# Allegro board eem2ttl.brd
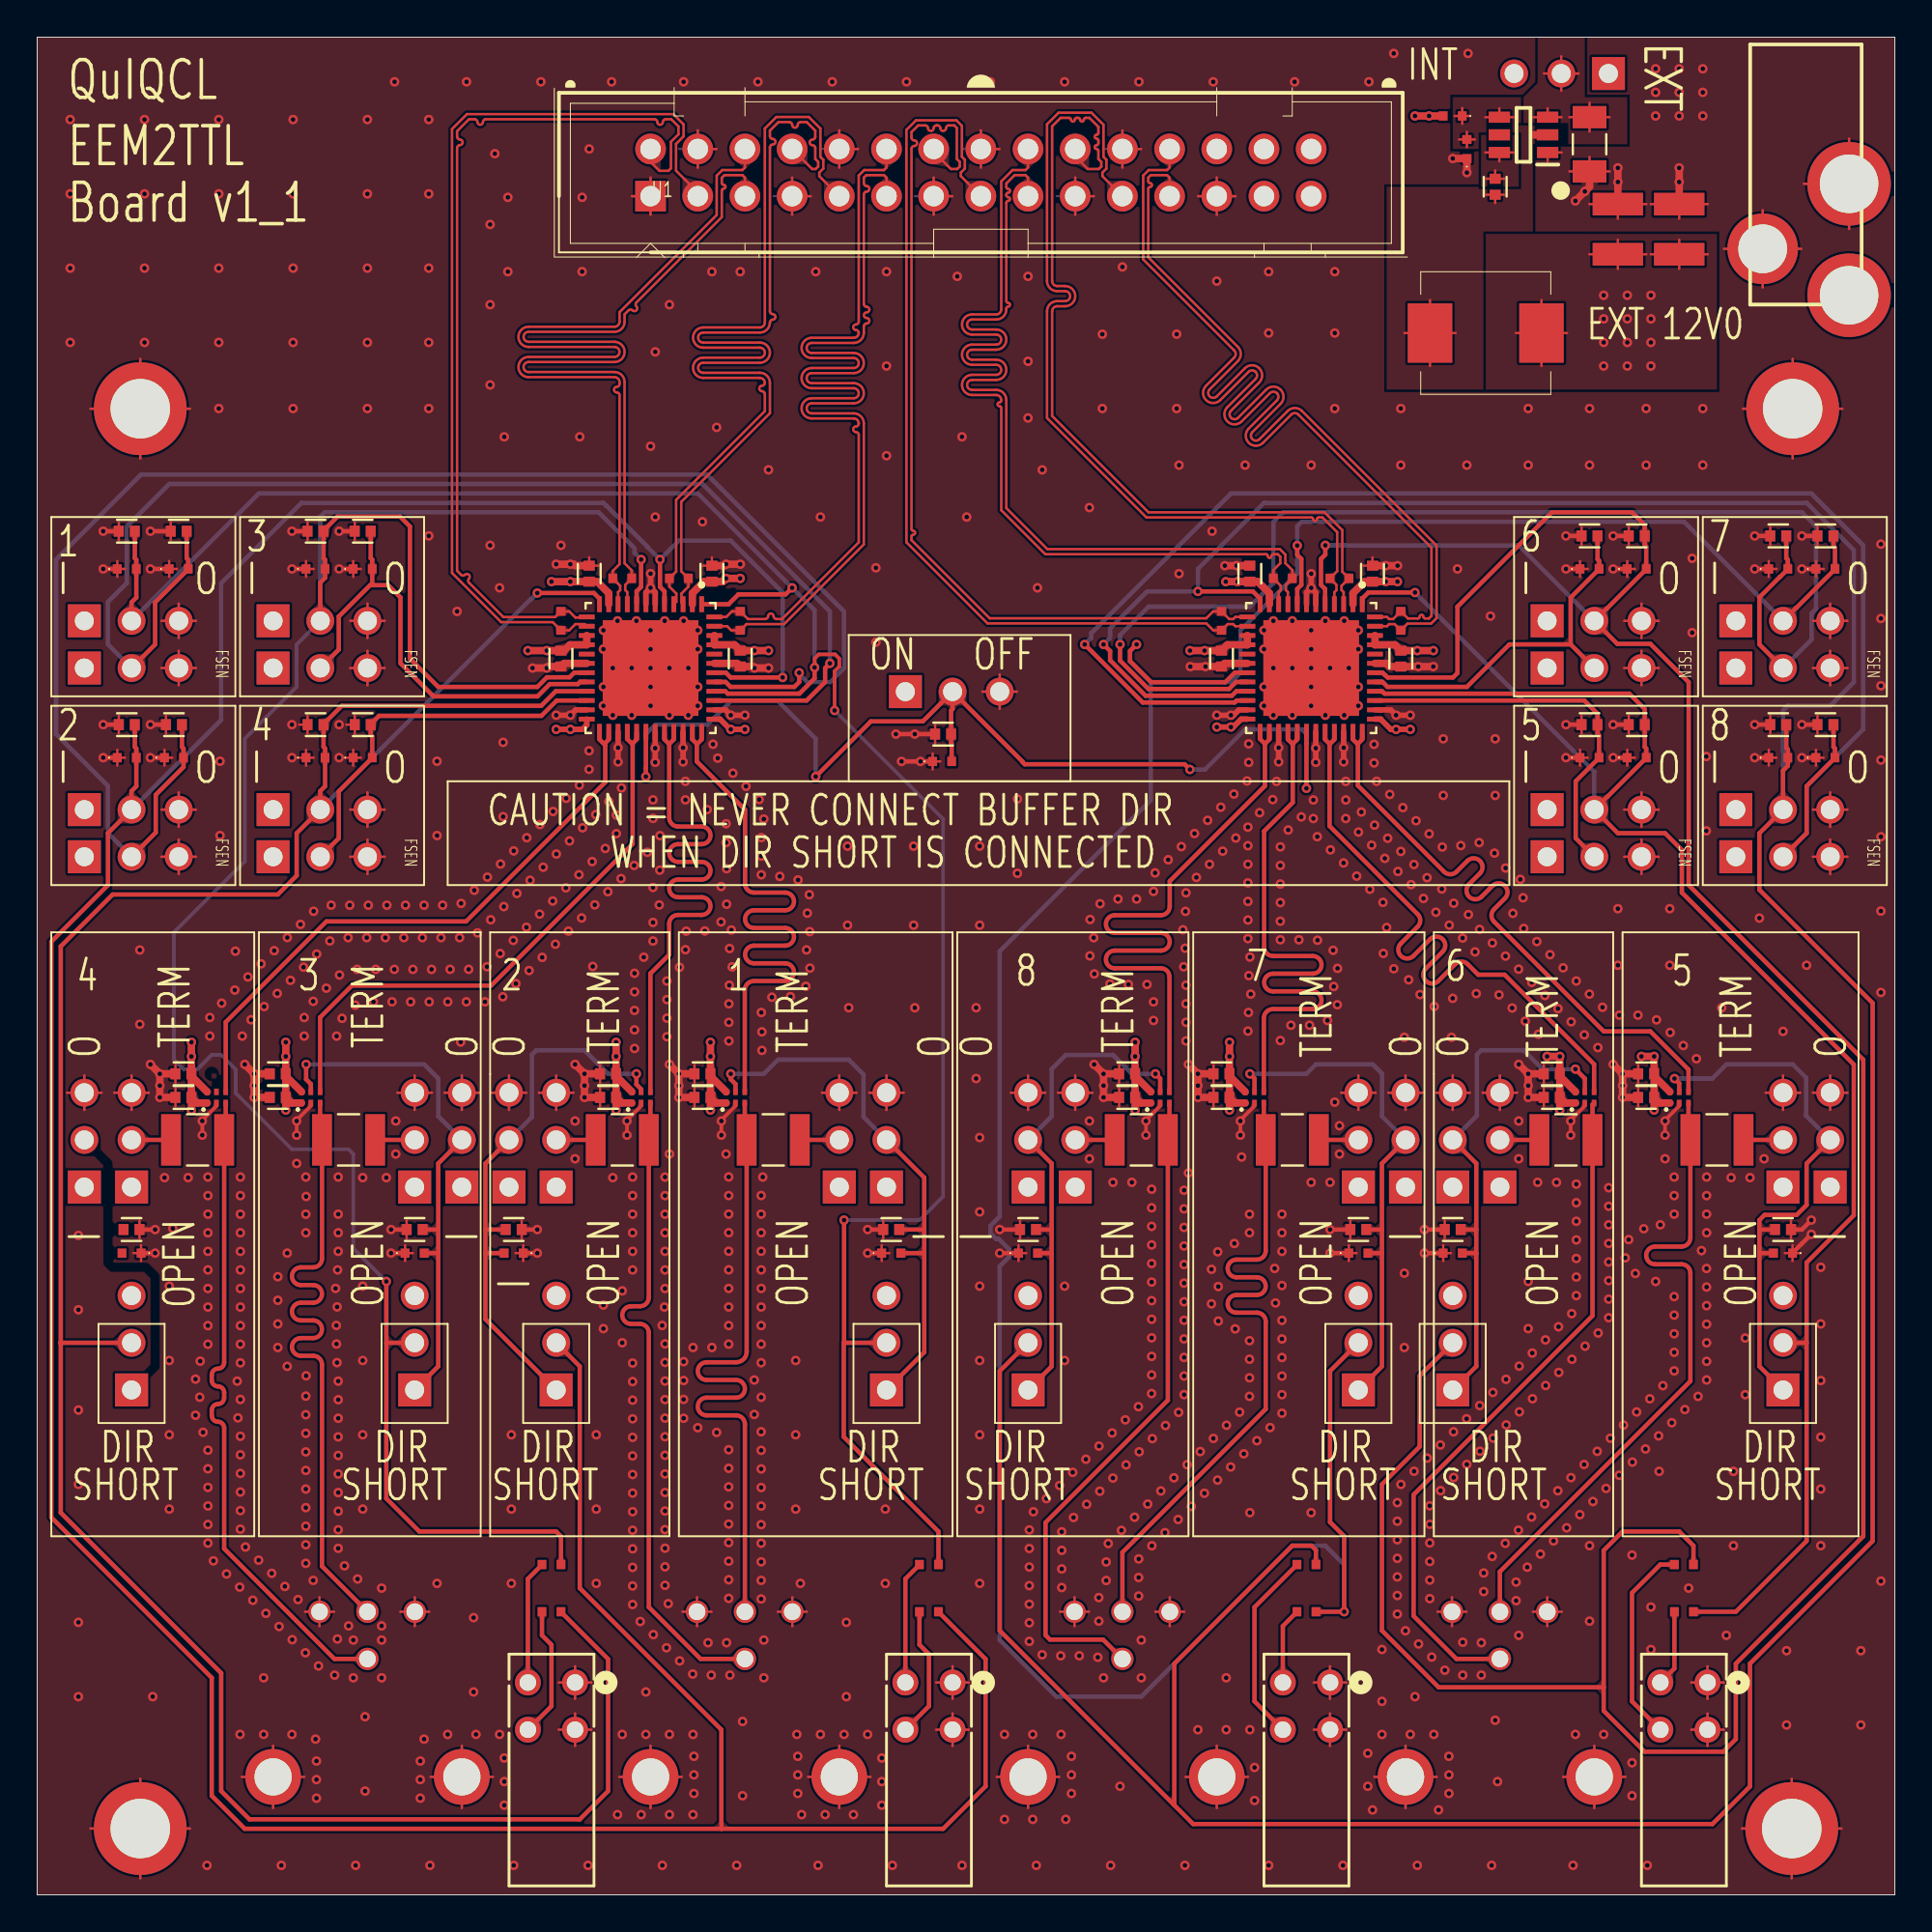
[diagram p0: board, top side]
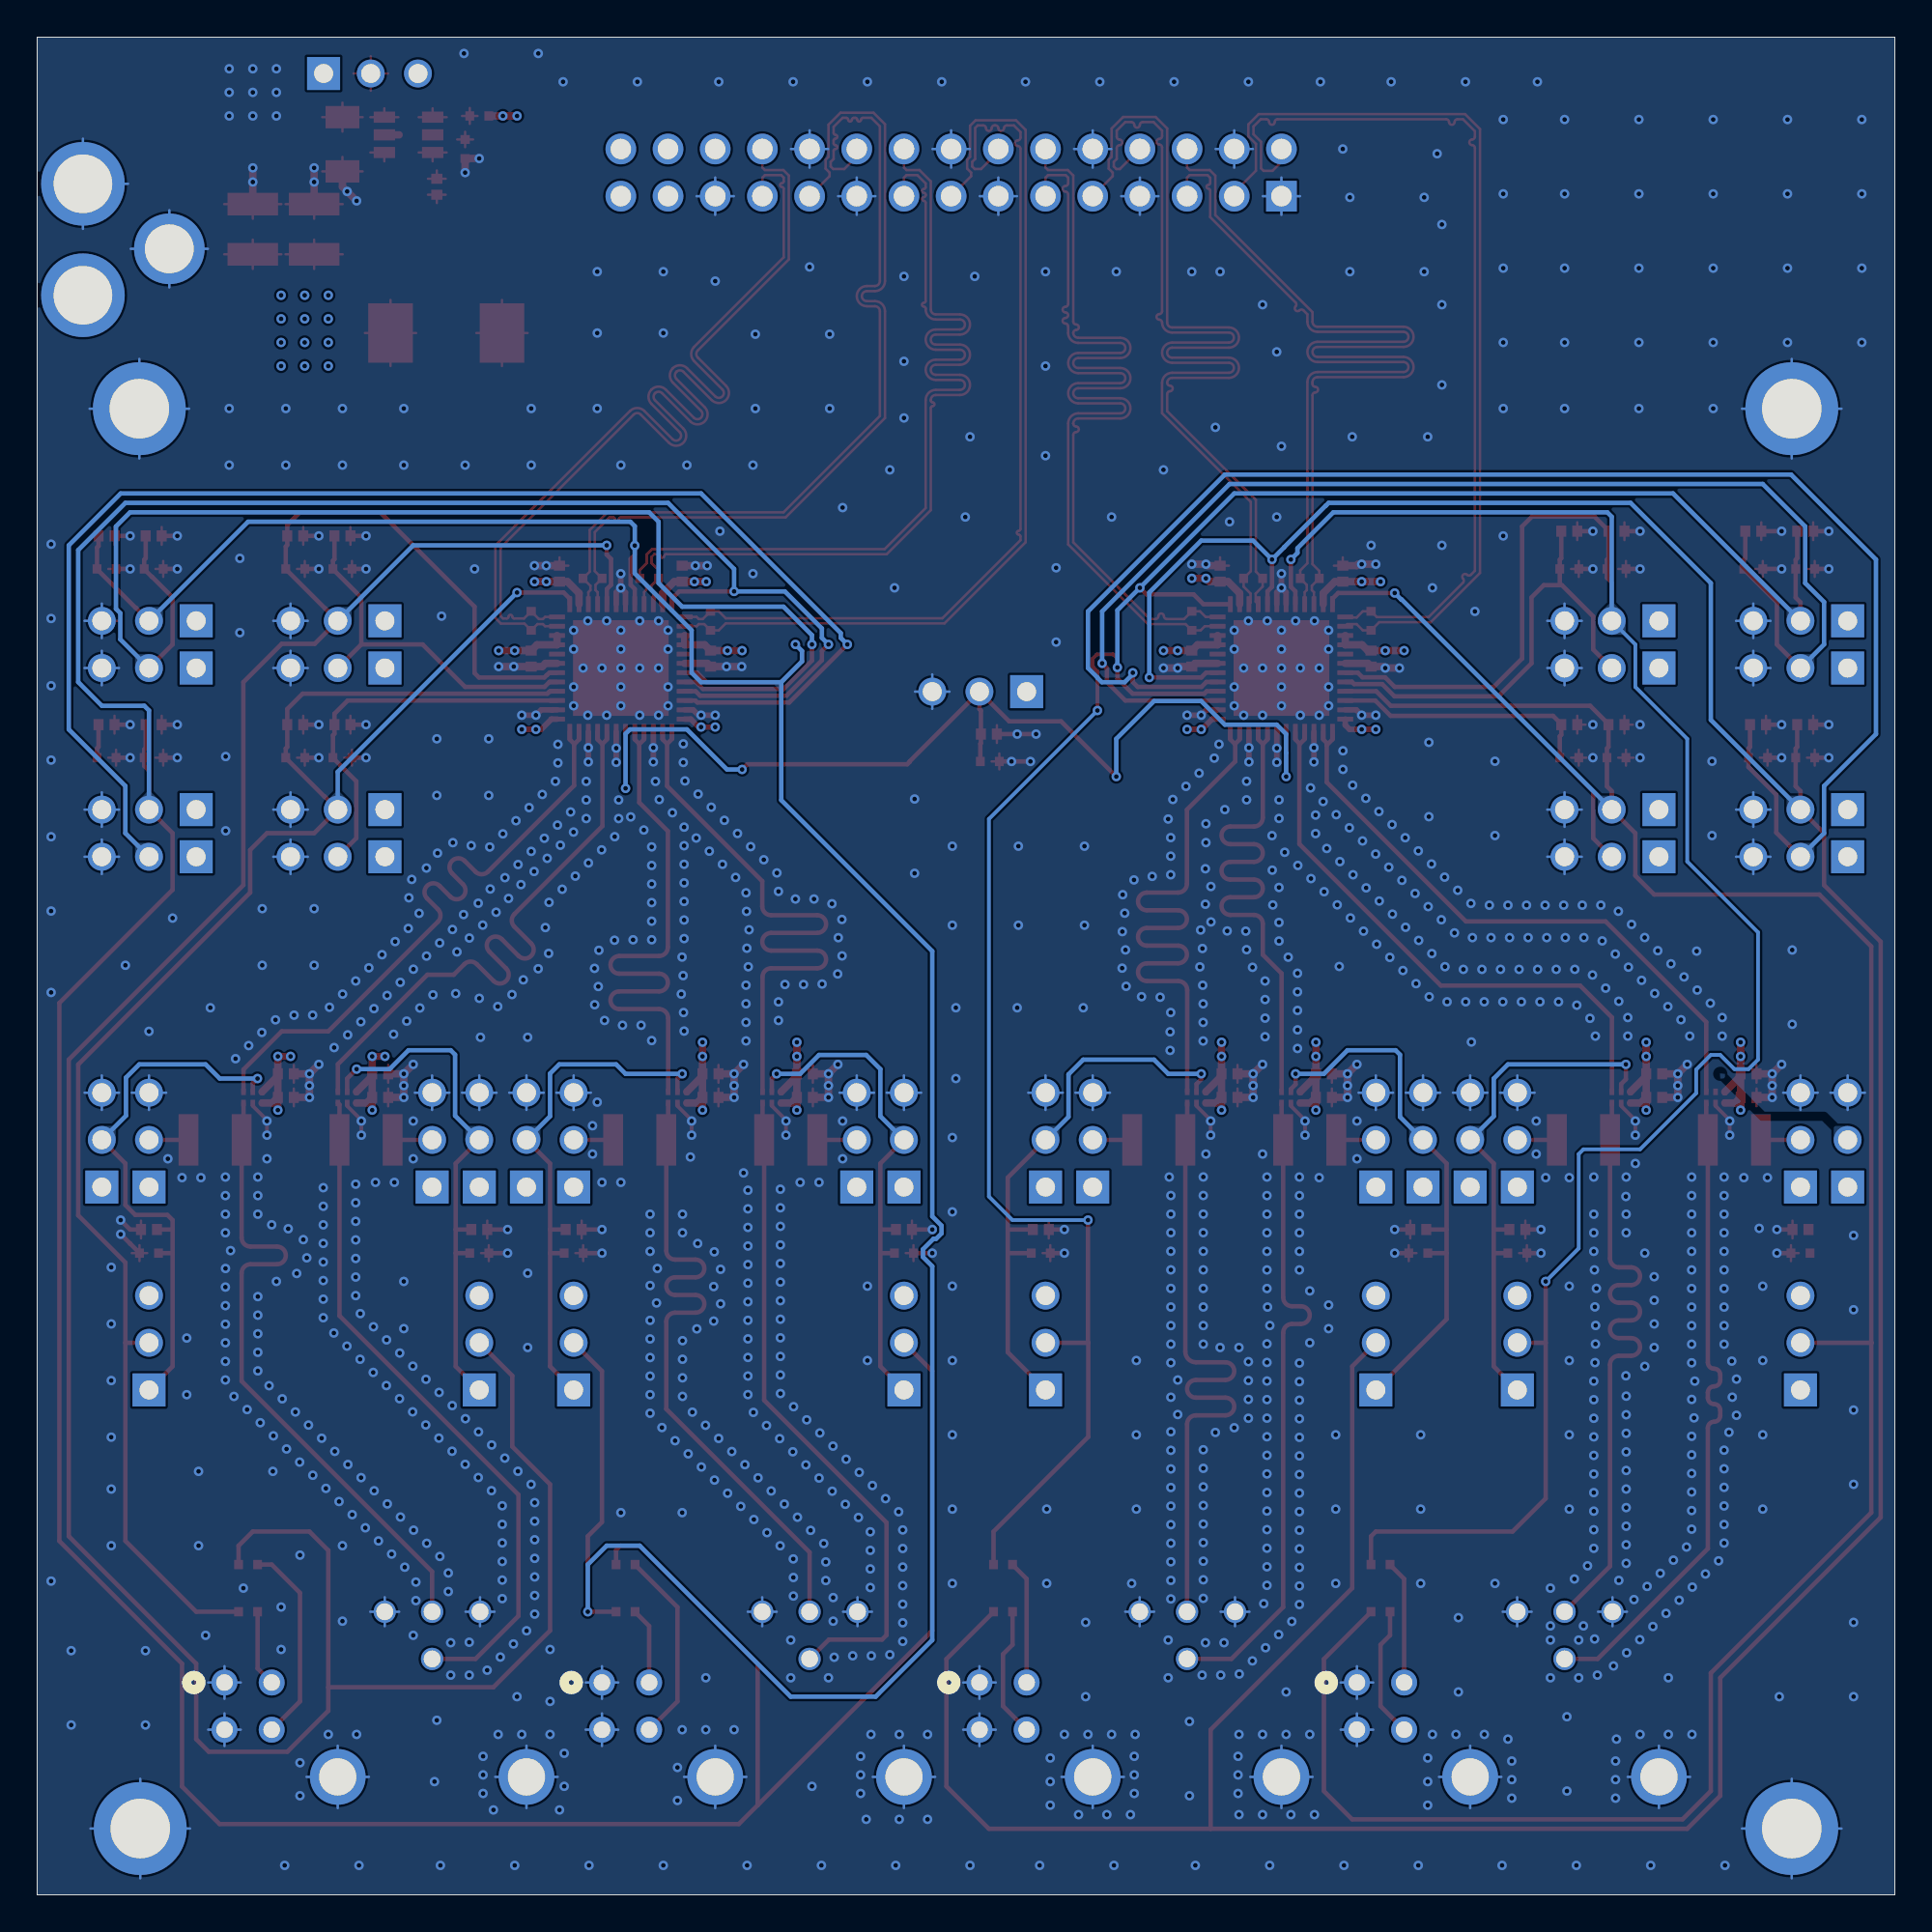
[diagram p1: board, bottom side, seen from below]

Outline 100 x 100 mm; copper layers: TOP, L1, L2, BOTTOM. Coordinates in mm from the lower left corner of the outline.
Outline path: 0,100 100,100 100,0 0,0 0,100

## Design rules (mm)
constraint set DEFAULT: min track width 0.127
net group LVDS: nets LVDS1_N LVDS1_P LVDS2_N LVDS2_P LVDS3_N LVDS3_P LVDS4_N LVDS4_P LVDS5_N LVDS5_P LVDS6_N LVDS6_P LVDS7_N LVDS7_P LVDS8_N LVDS8_P
net group SINGLE1: nets BUFFER_IN1 BUFFER_IN2 BUFFER_IN3 BUFFER_IN4 BUFFER_IN5 BUFFER_IN6 BUFFER_IN7 BUFFER_IN8
net group SINGLE2: nets BUFFER_OUT1 BUFFER_OUT2 BUFFER_OUT3 BUFFER_OUT4 BUFFER_OUT5 BUFFER_OUT6 BUFFER_OUT7 BUFFER_OUT8

## Placement (name value [footprint] x y rotation side)
C1  100nF  [CAPC1005X55N]  48.77 62.48 0 top
C2  100nF  [CAPC1005X55N]  78.49 91.95 90 top
C3  10uF  [CAPC3216X180N]  83.57 94.23 270 top
C4  22uF  [CAPC3225X270N]  85.09 89.66 270 top
C5  22uF  [CAPC3225X270N]  88.39 89.66 270 top
C6  100nF  [CAPC1005X55N]  4.83 73.41 0 top
C7  100nF  [CAPC1005X55N]  7.62 73.41 0 top
C8  100nF  [CAPC1005X55N]  45.97 35.81 0 top
C9  100nF  [CAPC1005X55N]  7.87 44.2 0 top
C10  100nF  [CAPC1005X55N]  7.87 42.93 0 top
C11  100nF  [CAPC1005X55N]  4.83 62.99 0 top
C12  100nF  [CAPC1005X55N]  7.37 62.99 0 top
C13  100nF  [CAPC1005X55N]  25.65 35.81 180 top
C14  100nF  [CAPC1005X55N]  12.95 44.2 0 top
C15  100nF  [CAPC1005X55N]  12.95 42.93 0 top
C16  100nF  [CAPC1005X55N]  14.99 73.41 0 top
C17  100nF  [CAPC1005X55N]  17.53 73.41 0 top
C18  100nF  [CAPC1005X55N]  20.32 35.81 0 top
C19  100nF  [CAPC1005X55N]  30.73 44.2 0 top
C20  100nF  [CAPC1005X55N]  30.73 42.93 0 top
C21  100nF  [CAPC1005X55N]  14.99 62.99 0 top
C22  100nF  [CAPC1005X55N]  17.53 62.99 0 top
C23  100nF  [CAPC1005X55N]  5.08 35.81 180 top
C24  100nF  [CAPC1005X55N]  35.81 44.2 0 top
C25  100nF  [CAPC1005X55N]  35.81 42.93 0 top
C26  100nF  [CAPC1005X55N]  86.11 62.99 0 top
C27  100nF  [CAPC1005X55N]  83.57 62.99 0 top
C28  100nF  [CAPC1005X55N]  93.98 35.81 180 top
C29  100nF  [CAPC1005X55N]  58.67 44.2 0 top
C30  100nF  [CAPC1005X55N]  58.67 42.93 0 top
C31  100nF  [CAPC1005X55N]  86.11 73.15 0 top
C32  100nF  [CAPC1005X55N]  83.57 73.15 0 top
C33  100nF  [CAPC1005X55N]  76.2 35.81 0 top
C34  100nF  [CAPC1005X55N]  63.75 42.93 0 top
C35  100nF  [CAPC1005X55N]  63.75 44.2 0 top
C36  100nF  [CAPC1005X55N]  96.27 73.15 0 top
C37  100nF  [CAPC1005X55N]  93.73 73.15 0 top
C38  100nF  [CAPC1005X55N]  71.12 35.81 0 top
C39  100nF  [CAPC1005X55N]  81.53 44.2 0 top
C40  100nF  [CAPC1005X55N]  81.53 42.93 0 top
C41  100nF  [CAPC1005X55N]  93.73 62.99 0 top
C42  100nF  [CAPC1005X55N]  96.27 62.99 0 top
C43  100nF  [CAPC1005X55N]  53.34 35.81 0 top
C44  100nF  [CAPC1005X55N]  86.61 44.2 0 top
C45  100nF  [CAPC1005X55N]  86.61 42.93 0 top
C46  100nF  [CAPC1005X55N]  37.85 66.55 90 top
C47  100nF  [CAPC1005X55N]  36.32 71.12 270 top
C48  100nF  [CAPC1005X55N]  29.72 71.12 270 top
C49  100nF  [CAPC1005X55N]  28.19 66.55 90 top
C50  100nF  [CAPC1005X55N]  73.41 66.55 90 top
C51  100nF  [CAPC1005X55N]  71.88 71.12 270 top
C52  100nF  [CAPC1005X55N]  65.28 71.12 270 top
C53  100nF  [CAPC1005X55N]  63.75 66.55 90 top
J1  DC-005-20A  [DC00520A]  97.54 86.11 270 top
M1  -  [M3MECHHOLE]  5.55 3.57 0 top
M2  -  [M3MECHHOLE]  94.45 3.57 0 top
M3  -  [M3MECHHOLE]  5.55 80 0 top
M4  -  [M3MECHHOLE]  94.5 80 0 top
PS1  AP62201WU-7  [SOT95P280X100-6N]  80.01 94.74 180 top
R1  30R  [RES_ERJ2RKF30R0X]  68.33 17.78 0 top
R2  30R  [RES_ERJ2RKF30R0X]  68.33 15.24 0 top
R3  30R  [RES_ERJ2RKF30R0X]  88.65 17.78 0 top
R4  30R  [RES_ERJ2RKF30R0X]  88.65 15.24 0 top
R5  30R  [RES_ERJ2RKF30R0X]  27.69 15.24 0 top
R6  30R  [RES_ERJ2RKF30R0X]  27.69 17.78 0 top
R7  30R  [RES_ERJ2RKF30R0X]  48.01 15.24 0 top
R8  30R  [RES_ERJ2RKF30R0X]  48.01 17.78 0 top
R9  10k  [ERJ2RKD1004X]  48.72 61.01 0 top
R10  31k6  [ERJ2RKD1004X]  76.2 95.76 180 top
R11  10k  [ERJ2RKD1004X]  76.96 93.98 90 top
R12  10k  [ERJ2RKD1004X]  4.83 71.37 0 top
R13  10k  [ERJ2RKD1004X]  7.62 71.37 0 top
R14  10k  [ERJ2RKD1004X]  45.97 34.54 0 top
R15  49R9  [RESC3126X65N]  39.62 40.64 180 top
R16  10k  [ERJ2RKD1004X]  4.83 61.21 0 top
R17  10k  [ERJ2RKD1004X]  7.37 61.21 0 top
R18  10k  [ERJ2RKD1004X]  25.65 34.54 180 top
R19  49R9  [RESC3126X65N]  31.5 40.64 0 top
R20  10k  [ERJ2RKD1004X]  14.99 71.37 0 top
R21  10k  [ERJ2RKD1004X]  17.53 71.37 0 top
R22  10k  [ERJ2RKD1004X]  20.32 34.54 0 top
R23  49R9  [RESC3126X65N]  16.76 40.64 180 top
R24  10k  [ERJ2RKD1004X]  14.99 61.21 0 top
R25  10k  [ERJ2RKD1004X]  17.53 61.21 0 top
R26  10k  [ERJ2RKD1004X]  5.08 34.54 180 top
R27  49R9  [RESC3126X65N]  8.64 40.64 0 top
R28  10k  [ERJ2RKD1004X]  86.11 61.21 0 top
R29  10k  [ERJ2RKD1004X]  83.57 61.21 0 top
R30  10k  [ERJ2RKD1004X]  93.98 34.54 180 top
R31  49R9  [RESC3126X65N]  90.42 40.64 180 top
R32  10k  [ERJ2RKD1004X]  86.11 71.37 0 top
R33  10k  [ERJ2RKD1004X]  83.57 71.37 0 top
R34  10k  [ERJ2RKD1004X]  76.2 34.54 0 top
R35  49R9  [RESC3126X65N]  82.3 40.64 0 top
R36  10k  [ERJ2RKD1004X]  96.27 71.37 0 top
R37  10k  [ERJ2RKD1004X]  93.73 71.37 0 top
R38  10k  [ERJ2RKD1004X]  71.12 34.54 0 top
R39  49R9  [RESC3126X65N]  67.56 40.64 180 top
R40  10k  [ERJ2RKD1004X]  93.73 61.21 0 top
R41  10k  [ERJ2RKD1004X]  96.27 61.21 0 top
R42  10k  [ERJ2RKD1004X]  53.34 34.54 0 top
R43  49R9  [RESC3126X65N]  59.44 40.64 0 top
R44  100.0R  [RES_ERJ2RKF1000X]  28.19 68.58 270 top
R45  100.0R  [RES_ERJ2RKF1000X]  31.5 70.87 180 top
R46  100.0R  [RES_ERJ2RKF1000X]  34.54 70.87 180 top
R47  100.0R  [RES_ERJ2RKF1000X]  37.85 68.58 90 top
R48  100.0R  [RES_ERJ2RKF1000X]  63.75 68.58 270 top
R49  100.0R  [RES_ERJ2RKF1000X]  67.06 70.87 180 top
R50  100.0R  [RES_ERJ2RKF1000X]  70.1 70.87 180 top
R51  100.0R  [RES_ERJ2RKF1000X]  73.41 68.58 90 top
U1  -  [N2530-6002-RB_3M]  33.02 91.44 0 top
U2  IC4_WP934EB2GD  [IC4_WP934EB2GD_KNB]  69.6 11.43 0 top
U3  IC4_WP934EB2GD  [IC4_WP934EB2GD_KNB]  89.92 11.43 0 top
U4  IC4_WP934EB2GD  [IC4_WP934EB2GD_KNB]  28.96 11.43 0 top
U5  IC4_WP934EB2GD  [IC4_WP934EB2GD_KNB]  49.28 11.43 0 top
U6  -  [DOSIN-801-0093]  38.1 12.7 180 top
U7  -  [DOSIN-801-0093]  17.78 12.7 180 top
U8  -  [DOSIN-801-0093]  78.74 12.7 180 top
U9  -  [PIN3BOOMELE]  82.04 98.04 180 top
U10  -  [DOSIN-801-0093]  58.42 12.7 180 top
U11  -  [PIN3BOOMELE]  49.28 64.77 0 top
U12  3.3uH  [MWSA0603S-3R3MT]  77.98 84.07 0 top
U14  -  [PIN3BOOMELE]  45.72 29.72 90 top
U15  -  [PIN3BOOMELE]  45.72 40.64 90 top
U16  -  [PIN3BOOMELE]  5.08 68.58 0 top
U17  -  [PIN3BOOMELE]  5.08 66.04 0 top
U18  -  [PIN3BOOMELE]  43.18 40.64 90 top
U19  -  [SN74LXC1T45DRYR]  37.59 42.93 0 top
U21  -  [PIN3BOOMELE]  27.94 29.72 90 top
U22  -  [PIN3BOOMELE]  25.4 40.64 90 top
U23  -  [PIN3BOOMELE]  5.08 58.42 0 top
U24  -  [PIN3BOOMELE]  5.08 55.88 0 top
U25  -  [PIN3BOOMELE]  27.94 40.64 90 top
U26  -  [SN74LXC1T45DRYR]  32.51 42.93 0 top
U28  -  [PIN3BOOMELE]  20.32 29.72 90 top
U29  -  [PIN3BOOMELE]  22.86 40.64 90 top
U30  -  [PIN3BOOMELE]  15.24 68.58 0 top
U31  -  [PIN3BOOMELE]  15.24 66.04 0 top
U32  -  [PIN3BOOMELE]  20.32 40.64 90 top
U33  -  [SN74LXC1T45DRYR]  14.73 42.93 0 top
U35  -  [PIN3BOOMELE]  5.08 29.72 90 top
U36  -  [PIN3BOOMELE]  2.54 40.64 90 top
U37  -  [PIN3BOOMELE]  15.24 58.42 0 top
U38  -  [PIN3BOOMELE]  15.24 55.88 0 top
U39  -  [PIN3BOOMELE]  5.08 40.64 90 top
U40  -  [SN74LXC1T45DRYR]  9.65 42.93 0 top
U42  -  [PIN3BOOMELE]  93.98 29.72 90 top
U43  -  [PIN3BOOMELE]  96.52 40.64 90 top
U44  -  [PIN3BOOMELE]  83.82 58.42 0 top
U45  -  [PIN3BOOMELE]  83.82 55.88 0 top
U46  -  [PIN3BOOMELE]  93.98 40.64 90 top
U47  -  [SN74LXC1T45DRYR]  88.39 42.93 0 top
U49  -  [PIN3BOOMELE]  76.2 29.72 90 top
U50  -  [PIN3BOOMELE]  76.2 40.64 90 top
U51  -  [PIN3BOOMELE]  83.82 68.58 0 top
U52  -  [PIN3BOOMELE]  83.82 66.04 0 top
U53  -  [PIN3BOOMELE]  78.74 40.64 90 top
U54  -  [SN74LXC1T45DRYR]  83.31 42.93 0 top
U56  -  [PIN3BOOMELE]  71.12 29.72 90 top
U57  -  [PIN3BOOMELE]  73.66 40.64 90 top
U58  -  [PIN3BOOMELE]  93.98 68.58 0 top
U59  -  [PIN3BOOMELE]  93.98 66.04 0 top
U60  -  [PIN3BOOMELE]  71.12 40.64 90 top
U61  -  [SN74LXC1T45DRYR]  65.53 42.93 0 top
U63  -  [PIN3BOOMELE]  53.34 29.72 90 top
U64  -  [PIN3BOOMELE]  53.34 40.64 90 top
U65  -  [PIN3BOOMELE]  93.98 58.42 0 top
U66  -  [PIN3BOOMELE]  93.98 55.88 0 top
U67  -  [PIN3BOOMELE]  55.88 40.64 90 top
U68  -  [SN74LXC1T45DRYR]  60.45 42.93 0 top
U69  SN65MLVD040RGZ  [QFN50P700X700X100-49N]  33.02 66.04 270 top
U70  SN65MLVD040RGZ  [QFN50P700X700X100-49N]  68.58 66.04 270 top

## Library data of the parts
C1 C2 C6-C53 = TMK105BJ104KV-F
C3 = CL31A106KBHNNNE
C4 C5 = TMK325BJ226MM-T
J1 = DC-005-20A
M1-M4 = M3MECHHOLE
PS1 = AP62201WU-7
R1-R8 = ERJ2RKF30R0X
R9 R11-R14 R16-R18 R20-R22 R24-R26 R28-R30 R32-R34 R36-R38 R40-R42 = ERJ2RKF1002X_0
R10 = ERJ-2RKF3162X_0
R15 R19 R23 R27 R31 R35 R39 R43 = AC1210FR-0749R9L
R44-R51 = ERJ2RKF1000X
U1 = N2530-6002-RB_3M
U2 U4 U5 = WP934EB2GD_0
U3 = WP934EB2GD_0: User Part Number: PN; Tolerance: TOL
U6-U8 U10 = DOSIN-801-0093
U9 U11 U14-U18 U21-U25 U28-U32 U35-U39 U42-U46 U49-U53 U56-U60 U63-U67 = PIN3BOOMELE
U12 = MWSA0603S-3R3MT
U19 U26 U33 U40 U47 U54 U61 U68 = SN74LXC1T45DRYR
U69 U70 = SN65MLVD040RGZT

## Footprints (pads in the part's own frame, mm; a bottom-side part is the same pattern mirrored in y, then rotated)
CAPC1005X55N
  rect 0.54x0.6 smd: 1(-0.43,0) 2(0.43,0)
CAPC3216X180N
  rect 1.2x1.82 smd: 1(-1.46,0) 2(1.46,0)
CAPC3225X270N
  rect 1.22x2.72 smd: 1(-1.35,0) 2(1.35,0)
DC00520A
  round 4.5 hole 3.15: 1(0,0) 2(-6,0)
  round 3.8 hole 2.625: 3(-2.5,-4.65)
DOSIN-801-0093
  round 1.2 hole 0.9: 1(-2.55,-2.54) 2(0,-2.54) 3(2.58,-2.54) 4(0,0)
  round 3 hole 2: 5(-5.08,6.35) 6(5.08,6.35)
ERJ2RKD1004X
  rect 0.475x0.5 smd: 1(-0.512,0) 2(0.512,0)
IC4_WP934EB2GD_KNB
  round 1.397 hole 0.889: 1(0,0) 2(-2.54,0) 3(0,-2.54) 4(-2.54,-2.54)
M3MECHHOLE
  round 5 hole 3.2: 1(0,0)
MWSA0603S-3R3MT
  rect 2.4x3.2 smd: 1(-3,0) 2(3,0)
N2530-6002-RB_3M
  rect 1.651x1.651 hole 1.1: 1(0,0)
  round 1.651 hole 1.1: 2(0,2.54) 3(2.54,0) 4(2.54,2.54) 5(5.08,0) 6(5.08,2.54) 7(7.62,0) 8(7.62,2.54) 9(10.16,0) 10(10.16,2.54) 11(12.7,0) 12(12.7,2.54) 13(15.24,0) 14(15.24,2.54) 15(17.78,0) 16(17.78,2.54) 17(20.32,0) 18(20.32,2.54) 19(22.86,0) 20(22.86,2.54) 21(25.4,0) 22(25.4,2.54) 23(27.94,0) 24(27.94,2.54) 25(30.48,0) 26(30.48,2.54) 27(33.02,0) 28(33.02,2.54) 29(35.56,0) 30(35.56,2.54)
PIN3BOOMELE
  rect 1.778x1.778 hole 1.02: 1(-2.54,0)
  round 1.5 hole 1.02: 2(0,0) 3(2.54,0)
QFN50P700X700X100-49N
  custom 0.86x0.26 smd: 1(-3.435,2.75) 2(-3.435,2.25) 3(-3.435,1.75) 4(-3.435,1.25) 5(-3.435,0.75) 6(-3.435,0.25) 7(-3.435,-0.25) 8(-3.435,-0.75) 9(-3.435,-1.25) 10(-3.435,-1.75) 11(-3.435,-2.25) 12(-3.435,-2.75) 25(3.435,-2.75) 26(3.435,-2.25) 27(3.435,-1.75) 28(3.435,-1.25) 29(3.435,-0.75) 30(3.435,-0.25) 31(3.435,0.25) 32(3.435,0.75) 33(3.435,1.25) 34(3.435,1.75) 35(3.435,2.25) 36(3.435,2.75)
  custom 0.26x0.86 smd: 13(-2.75,-3.435) 14(-2.25,-3.435) 15(-1.75,-3.435) 16(-1.25,-3.435) 17(-0.75,-3.435) 18(-0.25,-3.435) 19(0.25,-3.435) 20(0.75,-3.435) 21(1.25,-3.435) 22(1.75,-3.435) 23(2.25,-3.435) 24(2.75,-3.435) 37(2.75,3.435) 38(2.25,3.435) 39(1.75,3.435) 40(1.25,3.435) 41(0.75,3.435) 42(0.25,3.435) 43(-0.25,3.435) 44(-0.75,3.435) 45(-1.25,3.435) 46(-1.75,3.435) 47(-2.25,3.435) 48(-2.75,3.435)
  rect 5.15x5.15 smd: 49(0,0)
RES_ERJ2RKF30R0X
  rect 0.475x0.5 smd: 1(-0.512,0) 2(0.512,0)
RES_ERJ2RKF1000X
  rect 0.475x0.5 smd: 1(-0.512,0) 2(0.512,0)
RESC3126X65N
  rect 1.07x2.77 smd: 1(-1.43,0) 2(1.43,0)
SN74LXC1T45DRYR
  rect 0.25x0.35 smd: 1(-0.5,-0.3) 2(0,-0.3) 3(0.5,-0.3) 4(0.5,0.3) 5(0,0.3) 6(-0.5,0.3)
SOT95P280X100-6N
  rect 1.15x0.6 smd: 1(-1.3,0.95) 2(-1.3,0) 3(-1.3,-0.95) 4(1.3,-0.95) 5(1.3,0) 6(1.3,0.95)

## Nets
3V3: C4.2 C5.2 C9.2 C10.2 C14.2 C15.2 C19.2 C20.2 C24.2 C25.2 C29.2 C30.2 C34.2 C35.2 C39.2 C40.2 C44.2 C45.2 C46.2 C47.2 C48.2 C49.2 C50.2 C51.2 C52.2 C53.2 R10.2 U11.1 U12.2 U15.1 U16.1 U17.1 U19.1 U19.6(VCCB) U22.1 U23.1 U24.1 U26.1 U26.6(VCCB) U29.1 U30.1 U31.1 U33.1 U33.6(VCCB) U36.1 U37.1 U38.1 U40.1 U40.6(VCCB) U43.1 U44.1 U45.1 U47.1 U47.6(VCCB) U50.1 U51.1 U52.1 U54.1 U54.6(VCCB) U57.1 U58.1 U59.1 U61.1 U61.6(VCCB) U64.1 U65.1 U66.1 U68.1 U68.6(VCCB) U69.2 U69.11 U69.15 U69.16 U69.24 U69.37 U69.45 U69.46(VCC#46) U70.2 U70.11 U70.15 U70.16 U70.24 U70.37 U70.45 U70.46(VCC#46)
12V0: C3.1 PS1.3(VIN) U9.2
12V0EEM: U1.28 U1.29 U9.3
12V0EXT: J1.1 U9.1
GND: C1.1 C3.2 C4.1 C5.1 C6.1 C7.1 C8.1 C9.1 C10.1 C11.1 C12.1 C13.1 C14.1 C15.1 C16.1 C17.1 C18.1 C19.1 C20.1 C21.1 C22.1 C23.1 C24.1 C25.1 C26.1 C27.1 C28.1 C29.1 C30.1 C31.1 C32.1 C33.1 C34.1 C35.1 C36.1 C37.1 C38.1 C39.1 C40.1 C41.1 C42.1 C43.1 C44.1 C45.1 C46.1 C47.1 C48.1 C49.1 C50.1 C51.1 C52.1 C53.1 J1.2 J1.3 M1.1(GND) M2.1(GND) M3.1(GND) M4.1(GND) PS1.1 R9.1 R11.1 R12.1 R13.1 R14.1 R16.1 R17.1 R18.1 R20.1 R21.1 R22.1 R24.1 R25.1 R26.1 R28.1 R29.1 R30.1 R32.1 R33.1 R34.1 R36.1 R37.1 R38.1 R40.1 R41.1 R42.1 U1.1 U1.4 U1.7 U1.10 U1.13 U1.16 U1.19 U1.22 U1.25 U2.1 U2.3 U3.1 U3.3 U4.1 U4.3 U5.1 U5.3 U6.1 U6.3 U6.5 U6.6 U7.1 U7.3 U7.5 U7.6 U8.1 U8.3 U8.5 U8.6 U10.1 U10.3 U10.5 U10.6 U11.3 U15.3 U16.3 U17.3 U18.3 U19.2 U22.3 U23.3 U24.3 U25.3 U26.2 U29.3 U30.3 U31.3 U32.3 U33.2 U36.3 U37.3 U38.3 U39.3 U40.2 U43.3 U44.3 U45.3 U46.3 U47.2 U50.3 U51.3 U52.3 U53.3 U54.2 U57.3 U58.3 U59.3 U60.3 U61.2 U64.3 U65.3 U66.3 U67.3 U68.2 U69.6 U69.7 U69.18 U69.23 U69.27 U69.31 U69.34 U69.38 U69.43 U69.49 U70.6 U70.7 U70.18 U70.23 U70.27 U70.31 U70.34 U70.38 U70.43 U70.49
BUFFER_IN1: U19.4 U69.35 U69.36
BUFFER_IN2: U26.4 U69.32 U69.33
BUFFER_IN3: U33.4 U69.28 U69.29
BUFFER_IN4: U40.4 U69.25 U69.26
BUFFER_IN5: U47.4 U70.35 U70.36
BUFFER_IN6: U54.4 U70.32 U70.33
BUFFER_IN7: U61.4 U70.28 U70.29
BUFFER_IN8: U68.4 U70.25 U70.26
BUFFER_OUT1: R15.2 U6.2(SIG_UP) U19.3
BUFFER_OUT2: R19.2 U6.4 U26.3
BUFFER_OUT3: R23.2 U7.2(SIG_UP) U33.3
BUFFER_OUT4: R27.2 U7.4 U40.3
BUFFER_OUT5: R31.2 U8.2(SIG_UP) U47.3
BUFFER_OUT6: R35.2 U8.4 U54.3
BUFFER_OUT7: R39.2 U10.2(SIG_UP) U61.3
BUFFER_OUT8: R43.2 U10.4 U68.3
DIR1: C6.2 R8.2 R12.2 U14.2 U16.2 U69.1 U69.40
DIR2: C11.2 R7.2 R16.2 U21.2 U23.2 U69.5 U69.42
DIR3: C16.2 R6.2 R20.2 U28.2 U30.2 U69.8 U69.19
DIR4: C21.2 R5.2 R24.2 U35.2 U37.2 U69.12 U69.21
DIR5: C26.2 R4.2 R28.2 U42.2 U44.2 U70.1 U70.40
DIR6: C31.2 R3.2 R32.2 U49.2 U51.2 U70.5 U70.42
DIR7: C36.2 R2.2 R36.2 U56.2 U58.2 U70.8 U70.19
DIR8: C41.2 R1.2 R40.2 U63.2 U65.2 U70.12 U70.21
DIR_BUFFER1: C8.2 R14.2 U14.1 U15.2 U19.5
DIR_BUFFER2: C13.2 R18.2 U21.1 U22.2 U26.5
DIR_BUFFER3: C18.2 R22.2 U28.1 U29.2 U33.5
DIR_BUFFER4: C23.2 R26.2 U35.1 U36.2 U40.5
DIR_BUFFER5: C28.2 R30.2 U42.1 U43.2 U47.5
DIR_BUFFER6: C33.2 R34.2 U49.1 U50.2 U54.5
DIR_BUFFER7: C38.2 R38.2 U56.1 U57.2 U61.5
DIR_BUFFER8: C43.2 R42.2 U63.1 U64.2 U68.5
FSEN1: C7.2 R13.2 U17.2 U69.39
FSEN2: C12.2 R17.2 U24.2 U69.41
FSEN3: C17.2 R21.2 U31.2 U69.20
FSEN4: C22.2 R25.2 U38.2 U69.22
FSEN5: C27.2 R29.2 U45.2 U70.39
FSEN6: C32.2 R33.2 U52.2 U70.41
FSEN7: C37.2 R37.2 U59.2 U70.20
FSEN8: C42.2 R41.2 U66.2 U70.22
LVDS1_N: R47.2 U1.12 U69.48
LVDS1_P: R47.1 U1.11 U69.47
LVDS2_N: R46.2 U1.9 U69.4
LVDS2_P: R46.1 U1.8 U69.3
LVDS3_N: R45.2 U1.6 U69.10
LVDS3_P: R45.1 U1.5 U69.9
LVDS4_N: R44.2 U1.3 U69.14
LVDS4_P: R44.1 U1.2 U69.13
LVDS5_N: R51.2 U1.24 U70.48
LVDS5_P: R51.1 U1.23 U70.47
LVDS6_N: R50.2 U1.21 U70.4
LVDS6_P: R50.1 U1.20 U70.3
LVDS7_N: R49.2 U1.18 U70.10
LVDS7_P: R49.1 U1.17 U70.9
LVDS8_N: R48.2 U1.15 U70.14
LVDS8_P: R48.1 U1.14 U70.13
TERM1: R15.1 U18.2
TERM2: R19.1 U25.2
TERM3: R23.1 U32.2
TERM4: R27.1 U39.2
TERM5: R31.1 U46.2
TERM6: R35.1 U53.2
TERM7: R39.1 U60.2
TERM8: R43.1 U67.2
N208059: C2.1 PS1.2 U12.1
N208159: C2.2 PS1.6
N208207: PS1.4 R10.1 R11.2
N212931: C1.2 R9.2 U11.2 U69.30 U70.30
N242811: R1.1 U2.4
N242851: R2.1 U2.2(TOP)
N242977: R3.1 U3.4
N242981: R4.1 U3.2(TOP)
N243125: R5.1 U4.4
N243129: R6.1 U4.2(TOP)
N243275: R7.1 U5.4
N243279: R8.1 U5.2(TOP)

Pads without a net: PS1 5; U1 26 27 30; U14 3; U18 1; U21 3; U25 1; U28 3; U32 1; U35 3; U39 1; U42 3; U46 1; U49 3; U53 1; U56 3; U60 1; U63 3; U67 1; U69 17 44; U70 17 44

## Via types
v1: diameter 0.508, hole 0.254, TOP to BOTTOM, 1430 vias

## Routing (per net, layer and track width the routed paths; a pad name or vN(x,y) marks a point on that pad's centre or on a via; arc(x,y) is an arc through that point)
3V3: length 206.9
  TOP w0.127: 86.85,88.31 C5.2 ; C5.2 88.39,89.1 ; C5.2 88.39,87.52 ; C5.2 89.93,88.31 ; 79.6,84.07 U12.2 ; U12.2 80.98,85.85 ; U12.2 82.36,84.07 ; U12.2 80.98,82.3 ; C4.2 85.09,89.1 ; C4.2 83.55,88.31 ; C4.2 85.09,87.52 ; C4.2 86.63,88.31
  TOP w0.3: U69.37 36.76,63.29 37.31,62.74 v1(37.34,62.74) v1(38.1,62.74) ; U70.24 64.81,63.29 64.39,62.87 v1(64.26,62.87) v1(63.5,62.87) ; U70.37 72.31,63.29 72.87,62.74 v1(73.15,62.74) v1(73.91,62.74) ; 29.59,63.29 29.59,62.97 29.35,62.74 v1(28.7,62.74) v1(27.94,62.74)
  TOP w0.4: 13.38,44.07 U33.6 ; 13.38,44.07 C14.2 v1(13.38,45.13) v1(13.38,45.9) ; 13.38,44.07 C15.2 ; C25.2 36.24,44.07 ; C25.2 v1(36.24,42.24) ; C25.2 36.54,42.63 U19.1 ; 36.24,44.07 U19.6 ; 36.24,44.07 C24.2 v1(36.24,45.13) v1(36.24,45.9) ; v1(75.16,66.98) v1(74.3,66.98) C50.2 73.09,67.29 U70.45 U70.46 ; C15.2 13.68,42.63 U33.1 ; C15.2 v1(13.38,42.24) ; 81.96,44.07 C39.2 v1(81.96,45.13) v1(81.28,45.13) ; 81.96,44.07 C40.2 ; 81.96,44.07 U54.6 ; C34.2 v1(64.18,42.24) ; C34.2 64.18,44.07 ; C34.2 64.48,42.63 U61.1 ; 29.59,67.79 29.59,67.29 28.68,67.29 28.37,66.98 C49.2 v1(27.43,66.98) v1(26.42,66.98) ; v1(63.98,70.69) v1(64.62,70.69) C52.2 65.71,70.69 66.33,70.07 U70.11 ; v1(27.69,70.69) v1(28.7,70.69) C48.2 30.15,70.69 30.77,70.07 U69.11 ; C20.2 31.16,44.07 ; C20.2 31.46,42.63 U26.1 ; C20.2 v1(31.16,42.24) ; 31.16,44.07 U26.6 ; 31.16,44.07 C19.2 v1(31.16,45.13) v1(31.16,45.9) ; U68.1 59.4,42.63 C30.2 ; v1(59.1,45.9) v1(59.1,45.13) C29.2 59.1,44.07 ; v1(73.23,70.69) v1(72.59,70.69) C51.2 71.45,70.69 70.83,70.07 U70.2 ; v1(8.3,45.9) v1(8.3,45.13) C9.2 8.3,44.07 ; v1(39.37,66.98) v1(38.61,66.98) C46.2 37.53,67.29 U69.45 U69.46 ; R10.2 v1(74.93,95.76) v1(74.17,95.76) ; v1(86.36,45.13) v1(87.04,45.13) C44.2 87.04,44.07 ; U47.1 87.34,42.63 C45.2 ; 87.04,44.07 U47.6 ; 87.04,44.07 C45.2 ; 59.1,44.07 C30.2 ; 59.1,44.07 U68.6 ; v1(62.05,66.98) v1(62.84,66.98) C53.2 64.07,67.29 U70.16 U70.15 ; U54.1 82.26,42.63 C40.2 ; C10.2 v1(8.3,42.24) ; C10.2 8.6,42.63 U40.1 ; C10.2 8.3,44.07 ; 64.18,44.07 C35.2 v1(64.18,45.13) v1(64.18,45.9) ; 64.18,44.07 U61.6 ; U69.2 35.27,70.07 35.89,70.69 C47.2 36.91,70.69 v1(37.08,70.87) v1(37.85,70.87) ; C30.2 v1(59.1,42.24) ; C40.2 v1(81.96,42.24) ; 8.3,44.07 U40.6 ; C45.2 v1(87.04,42.24)
  L2 w0.127: U38.1 13.77,55.88 ; U38.1 11.63,55.88 ; U38.1 12.7,56.95 ; U38.1 12.7,54.81 ; U16.1 2.54,69.65 ; U16.1 3.61,68.58 ; U16.1 2.54,67.51 ; U16.1 1.47,68.58 ; 90.37,68.58 U58.1 ; U58.1 92.51,68.58 ; U58.1 91.44,67.51 ; U58.1 91.44,69.65 ; 12.7,67.51 U30.1 ; U30.1 11.63,68.58 ; U30.1 13.77,68.58 ; U30.1 12.7,69.65 ; 81.28,64.97 U52.1 ; U52.1 81.28,67.11 ; U52.1 82.35,66.04 ; U52.1 80.21,66.04 ; 12.7,57.35 U37.1 ; U37.1 13.77,58.42 ; U37.1 11.63,58.42 ; U37.1 12.7,59.49 ; U15.1 46.79,38.1 ; U15.1 45.72,39.17 ; U15.1 44.65,38.1 ; U15.1 45.72,37.03 ; U22.1 26.47,38.1 ; U22.1 24.33,38.1 ; U22.1 25.4,37.03 ; U22.1 25.4,39.17 ; U65.1 91.44,59.49 ; U65.1 91.44,57.35 ; U65.1 92.51,58.42 ; U65.1 90.37,58.42 ; U59.1 92.51,66.04 ; U59.1 91.44,67.11 ; U59.1 91.44,64.97 ; U59.1 90.37,66.04 ; U36.1 3.61,38.1 ; U36.1 2.54,39.17 ; U36.1 2.54,37.03 ; U36.1 1.47,38.1 ; 1.47,66.04 U17.1 ; U17.1 2.54,64.97 ; U17.1 3.61,66.04 ; U17.1 2.54,67.11 ; 95.45,38.1 U43.1 ; U43.1 97.59,38.1 ; U43.1 96.52,37.03 ; U43.1 96.52,39.17 ; U57.1 74.73,38.1 ; U57.1 73.66,37.03 ; U57.1 72.59,38.1 ; U57.1 73.66,39.17 ; 90.37,55.88 U66.1 ; U66.1 91.44,56.95 ; U66.1 91.44,54.81 ; U66.1 92.51,55.88 ; 12.7,64.97 U31.1 ; U31.1 13.77,66.04 ; U31.1 11.63,66.04 ; U31.1 12.7,67.11 ; 1.47,55.88 U24.1 ; U24.1 3.61,55.88 ; U24.1 2.54,54.81 ; U24.1 2.54,56.95 ; 45.67,64.77 U11.1 ; U11.1 46.74,63.7 ; U11.1 47.8,64.77 ; U11.1 46.74,65.84 ; 1.47,58.42 U23.1 ; U23.1 2.54,59.49 ; U23.1 2.54,57.35 ; U23.1 3.61,58.42 ; U44.1 82.35,58.42 ; U44.1 81.28,57.35 ; U44.1 80.21,58.42 ; U44.1 81.28,59.49 ; U29.1 23.93,38.1 ; U29.1 22.86,37.03 ; U29.1 22.86,39.17 ; U29.1 21.79,38.1 ; 52.27,38.1 U64.1 ; U64.1 53.34,37.03 ; U64.1 53.34,39.17 ; U64.1 54.41,38.1 ; U51.1 82.35,68.58 ; U51.1 81.28,67.51 ; U51.1 80.21,68.58 ; U51.1 81.28,69.65 ; U45.1 82.35,55.88 ; U45.1 80.21,55.88 ; U45.1 81.28,56.95 ; U45.1 81.28,54.81 ; 75.13,38.1 U50.1 ; U50.1 76.2,37.03 ; U50.1 76.2,39.17 ; U50.1 77.27,38.1
  vias: v1(84.33,86.11) v1(84.33,84.84) v1(84.33,83.57) v1(84.33,82.3) v1(85.6,86.11) v1(85.6,84.84) v1(85.6,83.57) v1(85.6,82.3) v1(86.87,86.11) v1(86.87,84.84) v1(86.87,83.57) v1(86.87,82.3)
12V0: length 9.4
  TOP w0.127: PS1.3 82.06,95.69 ; PS1.3 81.31,96.17 ; PS1.3 80.56,95.69 ; U9.2 82.04,98.97 ; U9.2 81.11,98.04 ; U9.2 82.04,97.12 ; U9.2 82.97,98.04 ; C3.1 83.57,96.47 ; C3.1 82.48,95.69 ; C3.1 84.65,95.69 ; C3.1 83.57,94.92
12V0EEM: length 11.7
  L2 w0.127: U1.28 67.04,93.98 ; U1.28 66.04,92.98 ; U1.28 65.04,93.98 ; U1.28 66.04,94.98 ; U1.29 69.58,91.44 ; U1.29 68.58,90.44 ; U1.29 68.58,92.44 ; U1.29 67.58,91.44 ; U9.3 80.43,98.04 ; U9.3 79.5,97.12 ; U9.3 78.57,98.04 ; U9.3 79.5,98.97
12V0EXT: length 11.6
  L2 w0.127: 84.58,96.98 U9.1 ; U9.1 85.65,98.04 ; U9.1 83.52,98.04 ; U9.1 84.58,99.11 ; J1.1 97.54,88.53 ; J1.1 97.54,83.68 ; J1.1 95.11,86.11
GND: length 1313.3
  TOP w0.127: R42.1 53.24,34.54 ; R42.1 52.83,34.12 ; R42.1 52.83,34.97 ; U1.19 55.88,92.44 ; U1.19 56.88,91.44 ; U1.19 55.88,90.44 ; 4.15,43.18 U39.3 ; U39.3 5.08,44.11 ; U39.3 5.08,42.25 ; U39.3 6.01,43.18 ; R41.1 96.17,61.21 ; R41.1 95.75,60.79 ; R41.1 95.75,61.64 ; U66.3 96.52,56.81 ; U66.3 95.59,55.88 ; U66.3 96.52,54.95 ; U66.3 97.45,55.88 ; R12.1 4.73,71.37 ; R12.1 4.31,70.95 ; R12.1 4.31,71.8 ; 75.69,34.12 R34.1 ; R34.1 76.1,34.54 ; R34.1 75.69,34.97 ; 2.54,42.25 U36.3 ; U36.3 1.61,43.18 ; U36.3 2.54,44.11 ; U36.3 3.47,43.18 ; U37.3 17.78,59.35 ; U37.3 17.78,57.49 ; U37.3 18.71,58.42 ; U37.3 16.85,58.42 ; 73.66,4.67 U8.6 ; U8.6 73.66,8.03 ; U8.6 71.98,6.35 ; U8.6 75.34,6.35 ; 14.11,62.99 C21.1 ; C21.1 14.56,62.51 ; C21.1 14.56,63.47 ; 63.32,42.45 C34.1 63.32,43.4 ; U5.3 49.28,9.77 ; U5.3 50.15,8.89 ; U5.3 49.28,8.01 ; U5.3 48.4,8.89 ; R13.1 7.11,71.8 ; R13.1 7.52,71.37 ; R13.1 7.11,70.95 ; 60.19,15.24 U10.1 ; U10.1 61.75,15.24 ; U10.1 60.97,16.02 ; U10.1 60.97,14.46 ; 5.51,35.34 C23.1 5.51,36.29 ; 42.25,43.18 U18.3 ; U18.3 44.11,43.18 ; U18.3 43.18,42.25 ; U18.3 43.18,44.11 ; 58.24,43.72 C29.1 58.24,44.67 ; U1.22 59.42,93.98 ; U1.22 58.42,92.98 ; U1.22 58.42,94.98 ; U57.3 74.59,43.18 ; U57.3 73.66,42.25 ; U57.3 72.73,43.18 ; U57.3 73.66,44.11 ; 55.84,14.46 U10.3 ; U10.3 56.62,15.24 ; U10.3 55.06,15.24 ; U10.3 55.84,16.02 ; 95.84,63.47 C42.1 95.84,62.51 ; 95.84,72.67 C36.1 95.84,73.63 ; 86.85,91.01 C5.1 ; C5.1 88.39,90.22 ; C5.1 89.93,91.01 ; U17.3 8.55,66.04 ; U17.3 7.62,65.11 ; U17.3 7.62,66.97 ; U17.3 6.69,66.04 ; 75.77,36.29 C33.1 75.77,35.34 ; 30.3,42.45 C20.1 30.3,43.4 ; 5.59,34.12 R26.1 ; R26.1 5.18,34.54 ; R26.1 5.59,34.97 ; U1.1 34.02,91.44 ; U1.1 33.02,92.44 ; U1.1 32.02,91.44 ; U1.1 33.02,90.44 ; 17.1,62.51 C22.1 ; C22.1 16.65,62.99 ; C22.1 17.1,63.47 ; 14.56,73.88 C16.1 14.56,72.93 ; 7.44,43.72 C9.1 7.44,44.67 ; 85.59,60.79 R28.1 ; R28.1 86.01,61.21 ; R28.1 85.59,61.64 ; 7.62,54.95 U24.3 ; U24.3 8.55,55.88 ; U24.3 7.62,56.81 ; U24.3 6.69,55.88 ; U8.3 76.16,16.02 ; U8.3 76.16,14.46 ; U8.3 76.94,15.24 ; U8.3 75.38,15.24 ; R30.1 94.91,34.54 ; R30.1 94.49,34.12 ; R30.1 94.08,34.54 ; 94.41,36.29 C28.1 94.41,35.34 ; 15.2,14.46 U7.3 ; U7.3 15.2,16.02 ; U7.3 14.42,15.24 ; U7.3 15.98,15.24 ; 95.59,43.18 U43.3 ; U43.3 96.52,44.11 ; U43.3 97.45,43.18 ; U43.3 96.52,42.25 ; U59.3 96.52,66.97 ; U59.3 95.59,66.04 ; U59.3 96.52,65.11 ; U59.3 97.45,66.04 ; U6.6 34.7,6.35 ; U6.6 33.02,8.03 ; U6.6 33.02,4.67 ; U6.6 31.34,6.35 ; 76.2,42.25 U50.3 ; U50.3 75.27,43.18 ; U50.3 76.2,44.11 ; U50.3 77.13,43.18 ; U6.5 44.86,6.35 ; U6.5 41.5,6.35 ; U6.5 43.18,8.03 ; U6.5 43.18,4.67 ; 4.4,73.88 C6.1 4.4,72.93 ; U1.4 36.56,93.98 ; U1.4 35.56,92.98 ; U1.4 35.56,94.98 ; 40.64,90.44 U1.7 ; U1.7 41.64,91.44 ; U1.7 40.64,92.44 ; U7.5 24.54,6.35 ; U7.5 21.18,6.35 ; U7.5 22.86,8.03 ; U7.5 22.86,4.67 ; 52.41,43.18 U64.3 ; U64.3 53.34,44.11 ; U64.3 54.27,43.18 ; U64.3 53.34,42.25 ; M3.1 5.55,82.68 ; M3.1 8.23,80 ; M3.1 2.87,80 ; M3.1 5.55,77.32 ; 48.26,90.44 U1.13 ; U1.13 49.26,91.44 ; U1.13 48.26,92.44 ; 81.1,44.67 C39.1 81.1,43.72 ; 93.3,62.51 C41.1 93.3,63.47 ; 85.68,63.47 C26.1 85.68,62.51 ; U1.16 50.8,94.98 ; U1.16 51.8,93.98 ; U1.16 50.8,92.98 ; 78.74,42.25 U53.3 ; U53.3 78.74,44.11 ; U53.3 79.67,43.18 ; U53.3 77.81,43.18 ; 34.74,15.24 U6.3 ; U6.3 35.52,16.02 ; U6.3 36.3,15.24 ; U6.3 35.52,14.46 ; 35.84,71.55 C47.1 36.32,72 ; M1.1 5.55,6.25 ; M1.1 2.87,3.57 ; M1.1 8.23,3.57 ; M1.1 5.55,0.89 ; 20.32,42.25 U32.3 ; U32.3 20.32,44.11 ; U32.3 21.25,43.18 ; U32.3 19.39,43.18 ; U4.1 28.96,12.31 ; U4.1 28.96,10.55 ; U4.1 29.83,11.43 ; U4.1 28.08,11.43 ; U22.3 26.33,43.18 ; U22.3 25.4,44.11 ; U22.3 24.47,43.18 ; U22.3 25.4,42.25 ; U65.3 96.52,59.35 ; U65.3 95.59,58.42 ; U65.3 96.52,57.49 ; U65.3 97.45,58.42 ; 7.44,43.4 C10.1 7.44,42.45 ; M4.1 94.5,82.68 ; M4.1 94.5,77.32 ; M4.1 91.82,80 ; M4.1 97.18,80 ; 95.11,92.11 J1.2 ; J1.2 97.54,94.53 ; J1.2 97.54,89.68 ; 63.5,4.67 U10.5 ; U10.5 65.18,6.35 ; U10.5 61.82,6.35 ; U10.5 63.5,8.03 ; 28.96,8.01 U4.3 ; U4.3 28.08,8.89 ; U4.3 28.96,9.77 ; U4.3 29.83,8.89 ; U67.3 55.88,44.11 ; U67.3 56.81,43.18 ; U67.3 54.95,43.18 ; U67.3 55.88,42.25 ; 81.1,42.45 C40.1 81.1,43.4 ; U30.3 18.71,68.58 ; U30.3 17.78,69.51 ; U30.3 17.78,67.65 ; U30.3 16.85,68.58 ; U23.3 7.62,59.35 ; U23.3 7.62,57.49 ; U23.3 6.69,58.42 ; U23.3 8.55,58.42 ; U8.5 85.5,6.35 ; U8.5 82.14,6.35 ; U8.5 83.82,4.67 ; U8.5 83.82,8.03 ; C3.2 84.65,92.77 ; C3.2 83.57,93.55 ; C3.2 82.48,92.77 ; U2.3 70.47,8.89 ; U2.3 69.6,8.01 ; U2.3 68.72,8.89 ; U2.3 69.6,9.77 ; U51.3 86.36,69.51 ; U51.3 87.29,68.58 ; U51.3 86.36,67.65 ; U51.3 85.43,68.58 ; R37.1 93.63,71.37 ; R37.1 93.21,71.8 ; R37.1 93.21,70.95 ; 83.05,60.79 R29.1 ; R29.1 83.47,61.21 ; R29.1 83.05,61.64 ; 86.36,57.49 U44.3 ; U44.3 85.43,58.42 ; U44.3 86.36,59.35 ; U44.3 87.29,58.42 ; 7.19,73.88 C7.1 7.19,72.93 ; 52.91,35.34 C43.1 52.91,36.29 ; R18.1 26.17,34.97 ; R18.1 26.17,34.12 ; R18.1 25.75,34.54 ; R9.1 48.21,61.44 ; R9.1 48.21,60.58 ; R9.1 48.62,61.01 ; 45.54,35.34 C8.1 45.54,36.29 ; 35.38,42.45 C25.1 35.38,43.4 ; R21.1 17.01,71.8 ; R21.1 17.01,70.95 ; R21.1 17.43,71.37 ; 83.05,70.95 R33.1 ; R33.1 83.47,71.37 ; R33.1 83.05,71.8 ; R32.1 86.01,71.37 ; R32.1 85.59,71.8 ; R32.1 85.59,70.95 ; 45.72,42.25 U15.3 ; U15.3 44.79,43.18 ; U15.3 46.65,43.18 ; U15.3 45.72,44.11 ; 29.72,72 C48.1 30.2,71.55 ; 19.89,35.34 C18.1 19.89,36.29 ; 4.4,62.51 C11.1 4.4,63.47 ; 26.08,35.34 C13.1 26.08,36.29 ; 81.29,14.46 U8.1 ; U8.1 80.51,15.24 ; U8.1 81.29,16.02 ; U8.1 82.07,15.24 ; R20.1 14.47,71.8 ; R20.1 14.89,71.37 ; R20.1 14.47,70.95 ; 70.69,36.29 C38.1 70.69,35.34 ; C4.1 86.63,91.01 ; C4.1 85.09,90.22 ; C4.1 83.55,91.01 ; 16.85,66.04 U31.3 ; U31.3 18.71,66.04 ; U31.3 17.78,65.11 ; U31.3 17.78,66.97 ; U46.3 93.98,44.11 ; U46.3 94.91,43.18 ; U46.3 93.98,42.25 ; U46.3 93.05,43.18 ; U11.3 52.74,64.77 ; U11.3 51.82,63.84 ; U11.3 51.82,65.7 ; U11.3 50.89,64.77 ; U6.1 41.43,15.24 ; U6.1 40.65,14.46 ; U6.1 40.65,16.02 ; U6.1 39.87,15.24 ; 17.78,54.95 U38.3 ; U38.3 16.85,55.88 ; U38.3 18.71,55.88 ; U38.3 17.78,56.81 ; R40.1 93.63,61.21 ; R40.1 93.21,61.64 ; R40.1 93.21,60.79 ; 14.06,61.21 R24.1 ; R24.1 14.47,60.79 ; R24.1 14.47,61.64 ; R24.1 14.89,61.21 ; R25.1 17.01,61.64 ; R25.1 17.43,61.21 ; R25.1 16.6,61.21 ; R25.1 17.01,60.79 ; U10.6 53.34,8.03 ; U10.6 55.02,6.35 ; U10.6 51.66,6.35 ; U10.6 53.34,4.67 ; R17.1 7.27,61.21 ; R17.1 6.85,61.64 ; R17.1 6.85,60.79 ; U60.3 71.12,44.11 ; U60.3 72.05,43.18 ; U60.3 71.12,42.25 ; U60.3 70.19,43.18 ; U45.3 86.36,56.81 ; U45.3 87.29,55.88 ; U45.3 85.43,55.88 ; U45.3 86.36,54.95 ; 94.45,0.89 M2.1 ; M2.1 94.45,6.25 ; M2.1 91.77,3.57 ; M2.1 97.13,3.57 ; 68.72,11.43 U2.1 ; U2.1 70.47,11.43 ; U2.1 69.6,12.31 ; U2.1 69.6,10.55 ; 58.24,43.4 C30.1 58.24,42.45 ; R38.1 71.02,34.54 ; R38.1 70.61,34.12 ; R38.1 70.61,34.97 ; 7.62,67.65 U16.3 ; U16.3 6.69,68.58 ; U16.3 8.55,68.58 ; U16.3 7.62,69.51 ; 63.32,43.72 C35.1 63.32,44.67 ; 35.38,43.72 C24.1 35.38,44.67 ; 89.92,10.55 U3.1 ; U3.1 89.92,12.31 ; U3.1 89.04,11.43 ; U3.1 90.79,11.43 ; 27.94,42.25 U25.3 ; U25.3 27.94,44.11 ; U25.3 27.01,43.18 ; U25.3 28.87,43.18 ; U58.3 97.45,68.58 ; U58.3 95.59,68.58 ; U58.3 96.52,69.51 ; U58.3 96.52,67.65 ; 86.36,65.11 U52.3 ; U52.3 85.43,66.04 ; U52.3 87.29,66.04 ; U52.3 86.36,66.97 ; U1.10 43.18,94.98 ; U1.10 43.18,92.98 ; U1.10 44.18,93.98 ; 95.75,70.95 R36.1 ; R36.1 96.17,71.37 ; R36.1 95.75,71.8 ; U29.3 22.86,44.11 ; U29.3 23.79,43.18 ; U29.3 22.86,42.25 ; U29.3 21.93,43.18 ; 92.89,86.53 J1.3 ; J1.3 90.81,88.61 ; J1.3 92.89,90.68 ; J1.3 94.96,88.61 ; 48.34,62.01 C1.1 48.34,62.96 ; 30.3,44.67 C19.1 30.3,43.72 ; 86.18,42.45 C45.1 86.18,43.4 ; 86.18,43.72 C44.1 86.18,44.67 ; U7.1 21.11,15.24 ; U7.1 20.33,16.02 ; U7.1 19.55,15.24 ; U7.1 20.33,14.46 ; R22.1 20.22,34.54 ; R22.1 19.81,34.12 ; R22.1 19.81,34.97 ; R14.1 45.88,34.54 ; R14.1 45.46,34.12 ; R14.1 45.46,34.97 ; U1.25 63.5,92.44 ; U1.25 63.5,90.44 ; U1.25 64.5,91.44 ; U1.25 62.5,91.44 ; 12.7,4.67 U7.6 ; U7.6 11.02,6.35 ; U7.6 14.38,6.35 ; U7.6 12.7,8.03 ; 83.14,62.51 C27.1 83.14,63.47 ; U5.1 49.28,12.31 ; U5.1 48.4,11.43 ; U5.1 50.15,11.43 ; U5.1 49.28,10.55 ; 4.31,60.79 R16.1 ; R16.1 4.73,61.21 ; R16.1 4.31,61.64 ; 94.49,34.56 94.49,34.97 ; 17.1,72.93 C17.1 17.1,73.88 ; U3.3 90.79,8.89 ; U3.3 89.92,8.01 ; U3.3 89.04,8.89 ; U3.3 89.92,9.77 ; 85.68,73.63 C31.1 85.68,72.67 ; 81.31,93.31 PS1.1 82.06,93.79 ; 83.14,72.67 C32.1 83.14,73.63 ; 71.88,72 C51.1 71.4,71.55 ; 6.94,62.51 C12.1 6.94,63.47 ; 93.3,73.63 C37.1 93.3,72.67
  TOP w0.2: v1(87.63,40.89) v1(87.63,41.66) 87.63,41.71 88.39,42.47 U47.2 ; U54.2 83.31,42.47 82.55,41.71 v1(82.55,41.66) v1(82.55,40.89) ; v1(64.77,40.89) v1(64.77,41.66) 64.77,41.71 65.53,42.47 U61.2 ; U40.2 9.65,42.47 8.89,41.71 v1(8.89,41.66) v1(8.89,40.89) ; v1(36.83,40.89) v1(36.83,41.66) 36.83,41.71 37.59,42.47 U19.2 ; U68.2 60.45,42.47 59.69,41.71 v1(59.69,41.66) v1(59.69,40.89) ; U26.2 32.51,42.47 31.75,41.71 v1(31.75,41.66) v1(31.75,40.89) ; v1(13.97,40.89) v1(13.97,41.66) 13.97,41.71 14.73,42.47 U33.2
  TOP w0.238: v1(26.92,34.54) R18.1 ; v1(6.1,61.21) R17.1 ; 94.99,35.05 94.49,34.56 R30.1 ; 94.99,35.05 95.5,35.56 v1(95.5,35.56) ; 94.99,35.05 95,35.05 ; C27.1 v1(82.3,62.99) ; R33.1 v1(82.3,71.37) ; v1(74.68,34.54) R34.1 ; C31.1 v1(84.84,73.15) ; v1(26.92,35.81) C13.1 ; C41.1 v1(92.46,62.99) ; v1(46.53,61.01) v1(47.55,61.01) R9.1 ; C1.1 v1(47.24,62.48) v1(46.23,62.48) ; v1(19.05,35.81) C18.1 ; R16.1 v1(3.56,61.21) ; v1(69.6,35.81) C38.1 ; C26.1 v1(84.84,62.99) ; v1(51.82,35.81) C43.1 ; C36.1 v1(95,73.15) ; R13.1 v1(6.1,71.37) ; C28.1 95,35.81 v1(95.5,36.32) ; v1(44.7,35.81) C8.1 ; v1(69.6,34.54) R38.1 ; v1(13.72,71.37) R20.1 ; v1(16.26,71.37) R21.1 ; R12.1 v1(3.56,71.37) ; C12.1 v1(6.1,62.99) ; R29.1 v1(82.3,61.21) ; R28.1 v1(84.84,61.21) ; C42.1 v1(95,62.99) ; v1(3.56,62.99) C11.1 ; C32.1 v1(82.3,73.15) ; R36.1 v1(95,71.37) ; R32.1 v1(84.84,71.37) ; v1(44.7,34.54) R14.1 ; R40.1 v1(92.46,61.21) ; C37.1 v1(92.46,73.15) ; v1(51.82,34.54) R42.1 ; v1(74.68,35.81) C33.1 ; C7.1 v1(6.1,73.41) ; v1(16.26,73.41) C17.1 ; v1(6.35,35.81) C23.1 ; C6.1 v1(3.56,73.41) ; v1(13.72,73.41) C16.1 ; R22.1 v1(19.05,34.54) ; v1(6.35,34.54) R26.1 ; R37.1 v1(92.46,71.37) ; R41.1 v1(95,61.21)
  TOP w0.3: v1(33.27,60.96) v1(33.27,61.73) 33.27,62.6 ; 31.27,62.6 v1(31.27,61.75) v1(31.27,60.99) ; 68.83,62.6 v1(68.83,61.73) v1(68.83,60.96) ; v1(38.1,63.5) v1(37.34,63.5) 37.05,63.79 U69.38 ; v1(70.33,60.99) v1(70.33,61.75) 70.33,62.6 ; 66.83,62.6 v1(66.83,61.75) v1(66.83,60.99) ; U70.6 68.83,70.11 v1(68.58,70.35) ; v1(27.94,63.5) v1(28.7,63.5) 28.99,63.79 29.59,63.79 ; 34.77,62.6 v1(34.77,61.75) v1(34.77,60.99) ; U70.38 72.28,63.79 72.28,63.79 72.86,63.79 v1(73.15,63.5) v1(73.91,63.5) ; v1(68.58,70.35) v1(68.58,71.12) ; v1(68.58,70.35) 68.33,70.1 U70.7 ; U69.7 32.77,70.11 32.91,70.25 v1(33.02,70.36) ; v1(33.02,70.36) 33.27,70.11 U69.6 ; v1(33.02,70.36) v1(33.02,71.12) ; v1(63.5,63.5) v1(64.26,63.5) 64.4,63.5 64.69,63.79 U70.23
  TOP w0.4: C4.1 v1(85.09,92.2) v1(85.09,92.96) ; 29.59,66.29 28.37,66.29 C49.1 27.51,66.12 v1(27.43,66.04) v1(26.67,66.04) ; v1(6.6,44.2) v1(6.6,43.56) v1(6.6,42.93) C10.1 ; v1(6.6,44.2) v1(6.1,44.7) ; v1(6.6,44.2) C9.1 ; v1(57.4,44.2) v1(57.4,43.56) v1(57.4,42.93) C30.1 ; v1(57.4,44.2) C29.1 ; v1(57.4,44.2) v1(56.9,44.7) ; v1(63.93,71.55) v1(64.57,71.55) C52.1 ; v1(11.68,44.2) v1(11.68,43.56) v1(11.68,42.93) C15.1 ; v1(11.68,44.2) v1(11.18,44.7) ; v1(11.68,44.2) C14.1 ; v1(27.94,71.63) v1(28.7,71.63) 28.89,71.63 28.97,71.55 C48.1 ; v1(62.48,44.2) C35.1 ; v1(62.48,44.2) v1(61.98,44.7) ; v1(62.48,44.2) v1(62.48,43.56) v1(62.48,42.93) C34.1 ; v1(82.8,91.19) v1(83.31,91.69) 83.57,91.95 C3.2 ; v1(62.08,66.12) v1(62.89,66.12) C53.1 63.93,66.29 U70.18 ; C44.1 v1(85.34,44.2) ; v1(85.34,44.2) v1(84.84,44.7) ; v1(85.34,44.2) v1(85.34,43.56) v1(85.34,42.93) C45.1 ; v1(88.39,92.96) v1(88.39,92.2) C5.1 ; v1(80.26,44.2) v1(79.76,44.7) ; v1(80.26,44.2) v1(80.26,43.56) v1(80.26,42.93) C40.1 ; v1(80.26,44.2) C39.1 ; v1(75.16,66.12) v1(74.34,66.12) C50.1 72.81,66.12 72.64,66.29 U70.43 ; v1(34.54,44.2) v1(34.04,44.7) ; v1(34.54,44.2) C24.1 ; v1(34.54,44.2) v1(34.54,43.56) v1(34.54,42.93) C25.1 ; 37.91,71.63 v1(37.85,71.63) v1(37.08,71.63) 37.01,71.55 C47.1 ; v1(29.46,44.2) v1(29.46,43.56) v1(29.46,42.93) C20.1 ; v1(29.46,44.2) v1(28.96,44.7) ; v1(29.46,44.2) C19.1 ; v1(76.2,93.47) R11.1 v1(76.96,92.71) ; v1(39.37,66.04) v1(38.61,66.04) 38.53,66.12 C46.1 37.67,66.29 U69.43 ; v1(73.23,71.55) v1(72.59,71.55) C51.1
  L1 w0.127: U1.7 40.64,92.44 ; U1.7 40.64,90.44 ; U1.7 41.64,91.44 ; U1.7 39.64,91.44 ; U18.3 43.18,44.11 ; U18.3 44.11,43.18 ; U18.3 42.25,43.18 ; U18.3 43.18,42.25 ; 96.52,54.95 U66.3 ; U66.3 95.59,55.88 ; U66.3 96.52,56.81 ; U66.3 97.45,55.88 ; 12.7,4.67 U7.6 ; U7.6 11.02,6.35 ; U7.6 14.38,6.35 ; U7.6 12.7,8.03 ; 71.98,6.35 U8.6 ; U8.6 73.66,4.67 ; U8.6 73.66,8.03 ; U8.6 75.34,6.35 ; 25.4,42.25 U22.3 ; U22.3 25.4,44.11 ; U22.3 24.47,43.18 ; U22.3 26.33,43.18 ; 68.72,8.89 U2.3 ; U2.3 70.47,8.89 ; U2.3 69.6,8.01 ; U2.3 69.6,9.77 ; 95.59,58.42 U65.3 ; U65.3 96.52,59.35 ; U65.3 97.45,58.42 ; U65.3 96.52,57.49 ; U59.3 96.52,66.97 ; U59.3 96.52,65.11 ; U59.3 97.45,66.04 ; U59.3 95.59,66.04 ; U10.6 53.34,8.03 ; U10.6 51.66,6.35 ; U10.6 53.34,4.67 ; U10.6 55.02,6.35 ; U51.3 86.36,69.51 ; U51.3 86.36,67.65 ; U51.3 87.29,68.58 ; U51.3 85.43,68.58 ; M4.1 97.18,80 ; M4.1 91.82,80 ; M4.1 94.5,77.32 ; M4.1 94.5,82.68 ; 92.89,86.53 J1.3 ; J1.3 92.89,90.68 ; J1.3 94.96,88.61 ; J1.3 90.81,88.61 ; U7.5 24.54,6.35 ; U7.5 22.86,4.67 ; U7.5 22.86,8.03 ; U7.5 21.18,6.35 ; U31.3 18.71,66.04 ; U31.3 16.85,66.04 ; U31.3 17.78,65.11 ; U31.3 17.78,66.97 ; U10.1 60.97,16.02 ; U10.1 60.97,14.46 ; U10.1 60.19,15.24 ; U10.1 61.75,15.24 ; U1.4 35.56,94.98 ; U1.4 34.56,93.98 ; U1.4 36.56,93.98 ; U1.4 35.56,92.98 ; U17.3 8.55,66.04 ; U17.3 6.69,66.04 ; U17.3 7.62,66.97 ; U17.3 7.62,65.11 ; U39.3 6.01,43.18 ; U39.3 5.08,44.11 ; U39.3 4.15,43.18 ; U39.3 5.08,42.25 ; 54.95,43.18 U67.3 ; U67.3 56.81,43.18 ; U67.3 55.88,42.25 ; U67.3 55.88,44.11 ; U23.3 7.62,59.35 ; U23.3 8.55,58.42 ; U23.3 7.62,57.49 ; U23.3 6.69,58.42 ; U7.3 15.2,16.02 ; U7.3 15.98,15.24 ; U7.3 15.2,14.46 ; U7.3 14.42,15.24 ; 93.98,42.25 U46.3 ; U46.3 93.98,44.11 ; U46.3 94.91,43.18 ; U46.3 93.05,43.18 ; U8.1 82.07,15.24 ; U8.1 81.29,16.02 ; U8.1 80.51,15.24 ; U8.1 81.29,14.46 ; U5.1 49.28,12.31 ; U5.1 49.28,10.55 ; U5.1 48.4,11.43 ; U5.1 50.15,11.43 ; U11.3 52.74,64.77 ; U11.3 50.89,64.77 ; U11.3 51.82,63.84 ; U11.3 51.82,65.7 ; U3.3 90.79,8.89 ; U3.3 89.04,8.89 ; U3.3 89.92,9.77 ; U3.3 89.92,8.01 ; U1.13 48.26,92.44 ; U1.13 48.26,90.44 ; U1.13 49.26,91.44 ; U1.13 47.26,91.44 ; 17.78,54.95 U38.3 ; U38.3 18.71,55.88 ; U38.3 16.85,55.88 ; U38.3 17.78,56.81 ; 42.18,93.98 U1.10 ; U1.10 43.18,94.98 ; U1.10 43.18,92.98 ; U1.10 44.18,93.98 ; M1.1 5.55,6.25 ; M1.1 8.23,3.57 ; M1.1 5.55,0.89 ; M1.1 2.87,3.57 ; 39.87,15.24 U6.1 ; U6.1 40.65,14.46 ; U6.1 41.43,15.24 ; U6.1 40.65,16.02 ; 53.34,42.25 U64.3 ; U64.3 53.34,44.11 ; U64.3 54.27,43.18 ; U64.3 52.41,43.18 ; U16.3 8.55,68.58 ; U16.3 7.62,67.65 ; U16.3 7.62,69.51 ; U16.3 6.69,68.58 ; 95.59,68.58 U58.3 ; U58.3 96.52,67.65 ; U58.3 96.52,69.51 ; U58.3 97.45,68.58 ; U30.3 18.71,68.58 ; U30.3 17.78,67.65 ; U30.3 17.78,69.51 ; U30.3 16.85,68.58 ; U8.3 76.94,15.24 ; U8.3 75.38,15.24 ; U8.3 76.16,16.02 ; U8.3 76.16,14.46 ; 48.4,8.89 U5.3 ; U5.3 50.15,8.89 ; U5.3 49.28,9.77 ; U5.3 49.28,8.01 ; U7.1 21.11,15.24 ; U7.1 20.33,16.02 ; U7.1 19.55,15.24 ; U7.1 20.33,14.46 ; U24.3 7.62,56.81 ; U24.3 7.62,54.95 ; U24.3 8.55,55.88 ; U24.3 6.69,55.88 ; 89.92,10.55 U3.1 ; U3.1 90.79,11.43 ; U3.1 89.04,11.43 ; U3.1 89.92,12.31 ; U43.3 97.45,43.18 ; U43.3 96.52,44.11 ; U43.3 96.52,42.25 ; U43.3 95.59,43.18 ; U32.3 21.25,43.18 ; U32.3 20.32,42.25 ; U32.3 20.32,44.11 ; U32.3 19.39,43.18 ; U44.3 87.29,58.42 ; U44.3 86.36,57.49 ; U44.3 86.36,59.35 ; U44.3 85.43,58.42 ; U6.6 34.7,6.35 ; U6.6 33.02,4.67 ; U6.6 33.02,8.03 ; U6.6 31.34,6.35 ; U60.3 72.05,43.18 ; U60.3 71.12,44.11 ; U60.3 71.12,42.25 ; U60.3 70.19,43.18 ; 27.94,42.25 U25.3 ; U25.3 27.94,44.11 ; U25.3 27.01,43.18 ; U25.3 28.87,43.18 ; J1.2 97.54,94.53 ; J1.2 97.54,89.68 ; J1.2 95.11,92.11 ; U29.3 23.79,43.18 ; U29.3 22.86,44.11 ; U29.3 22.86,42.25 ; U29.3 21.93,43.18 ; U4.3 29.83,8.89 ; U4.3 28.96,9.77 ; U4.3 28.08,8.89 ; U4.3 28.96,8.01 ; 72.73,43.18 U57.3 ; U57.3 73.66,44.11 ; U57.3 73.66,42.25 ; U57.3 74.59,43.18 ; 45.72,42.25 U15.3 ; U15.3 45.72,44.11 ; U15.3 46.65,43.18 ; U15.3 44.79,43.18 ; U10.5 65.18,6.35 ; U10.5 63.5,4.67 ; U10.5 61.82,6.35 ; U10.5 63.5,8.03 ; U1.19 56.88,91.44 ; U1.19 54.88,91.44 ; U1.19 55.88,90.44 ; U1.19 55.88,92.44 ; 28.96,10.55 U4.1 ; U4.1 28.96,12.31 ; U4.1 29.83,11.43 ; U4.1 28.08,11.43 ; 78.74,42.25 U53.3 ; U53.3 79.67,43.18 ; U53.3 77.81,43.18 ; U53.3 78.74,44.11 ; M2.1 94.45,6.25 ; M2.1 94.45,0.89 ; M2.1 97.13,3.57 ; M2.1 91.77,3.57 ; 83.82,4.67 U8.5 ; U8.5 83.82,8.03 ; U8.5 82.14,6.35 ; U8.5 85.5,6.35 ; U1.25 64.5,91.44 ; U1.25 62.5,91.44 ; U1.25 63.5,90.44 ; U1.25 63.5,92.44 ; 55.84,14.46 U10.3 ; U10.3 56.62,15.24 ; U10.3 55.84,16.02 ; U10.3 55.06,15.24 ; U1.1 34.02,91.44 ; U1.1 33.02,90.44 ; U1.1 32.02,91.44 ; U1.1 33.02,92.44 ; U6.3 36.3,15.24 ; U6.3 34.74,15.24 ; U6.3 35.52,14.46 ; U6.3 35.52,16.02 ; U1.16 51.8,93.98 ; U1.16 49.8,93.98 ; U1.16 50.8,92.98 ; U1.16 50.8,94.98 ; U50.3 77.13,43.18 ; U50.3 75.27,43.18 ; U50.3 76.2,44.11 ; U50.3 76.2,42.25 ; U36.3 2.54,44.11 ; U36.3 1.61,43.18 ; U36.3 2.54,42.25 ; U36.3 3.47,43.18 ; U1.22 58.42,94.98 ; U1.22 59.42,93.98 ; U1.22 57.42,93.98 ; U1.22 58.42,92.98 ; U45.3 87.29,55.88 ; U45.3 85.43,55.88 ; U45.3 86.36,54.95 ; U45.3 86.36,56.81 ; 43.18,4.67 U6.5 ; U6.5 44.86,6.35 ; U6.5 41.5,6.35 ; U6.5 43.18,8.03 ; 68.72,11.43 U2.1 ; U2.1 69.6,12.31 ; U2.1 69.6,10.55 ; U2.1 70.47,11.43 ; 17.78,57.49 U37.3 ; U37.3 16.85,58.42 ; U37.3 17.78,59.35 ; U37.3 18.71,58.42 ; 2.87,80 M3.1 ; M3.1 5.55,77.32 ; M3.1 8.23,80 ; M3.1 5.55,82.68 ; U52.3 87.29,66.04 ; U52.3 85.43,66.04 ; U52.3 86.36,65.11 ; U52.3 86.36,66.97
  L2 w0.127: 91.77,3.57 M2.1 ; M2.1 94.45,6.25 ; M2.1 94.45,0.89 ; M2.1 97.13,3.57 ; U10.6 53.34,8.03 ; U10.6 55.02,6.35 ; U10.6 51.66,6.35 ; U10.6 53.34,4.67 ; 75.38,15.24 U8.3 ; U8.3 76.94,15.24 ; U8.3 76.16,14.46 ; U8.3 76.16,16.02 ; U7.6 14.38,6.35 ; U7.6 12.7,4.67 ; U7.6 12.7,8.03 ; U7.6 11.02,6.35 ; 61.82,6.35 U10.5 ; U10.5 65.18,6.35 ; U10.5 63.5,8.03 ; U10.5 63.5,4.67 ; 48.4,11.43 U5.1 ; U5.1 50.15,11.43 ; U5.1 49.28,12.31 ; U5.1 49.28,10.55 ; U10.1 60.97,16.02 ; U10.1 60.19,15.24 ; U10.1 61.75,15.24 ; U10.1 60.97,14.46 ; 35.52,14.46 U6.3 ; U6.3 34.74,15.24 ; U6.3 35.52,16.02 ; U6.3 36.3,15.24 ; M1.1 8.23,3.57 ; M1.1 2.87,3.57 ; M1.1 5.55,0.89 ; M1.1 5.55,6.25 ; 43.18,4.67 U6.5 ; U6.5 44.86,6.35 ; U6.5 43.18,8.03 ; U6.5 41.5,6.35 ; 73.66,4.67 U8.6 ; U8.6 73.66,8.03 ; U8.6 75.34,6.35 ; U8.6 71.98,6.35 ; U3.1 89.92,12.31 ; U3.1 89.92,10.55 ; U3.1 89.04,11.43 ; U3.1 90.79,11.43 ; 81.29,14.46 U8.1 ; U8.1 80.51,15.24 ; U8.1 81.29,16.02 ; U8.1 82.07,15.24 ; U8.5 85.5,6.35 ; U8.5 83.82,4.67 ; U8.5 82.14,6.35 ; U8.5 83.82,8.03 ; 68.72,11.43 U2.1 ; U2.1 69.6,12.31 ; U2.1 69.6,10.55 ; U2.1 70.47,11.43 ; U7.1 20.33,16.02 ; U7.1 19.55,15.24 ; U7.1 21.11,15.24 ; U7.1 20.33,14.46 ; 14.42,15.24 U7.3 ; U7.3 15.98,15.24 ; U7.3 15.2,16.02 ; U7.3 15.2,14.46 ; U4.1 29.83,11.43 ; U4.1 28.08,11.43 ; U4.1 28.96,10.55 ; U4.1 28.96,12.31 ; 28.96,8.01 U4.3 ; U4.3 28.96,9.77 ; U4.3 28.08,8.89 ; U4.3 29.83,8.89 ; U2.3 69.6,9.77 ; U2.3 68.72,8.89 ; U2.3 69.6,8.01 ; U2.3 70.47,8.89 ; U5.3 50.15,8.89 ; U5.3 48.4,8.89 ; U5.3 49.28,9.77 ; U5.3 49.28,8.01 ; U6.6 33.02,8.03 ; U6.6 34.7,6.35 ; U6.6 31.34,6.35 ; U6.6 33.02,4.67 ; 55.84,14.46 U10.3 ; U10.3 55.06,15.24 ; U10.3 55.84,16.02 ; U10.3 56.62,15.24 ; 40.65,14.46 U6.1 ; U6.1 41.43,15.24 ; U6.1 39.87,15.24 ; U6.1 40.65,16.02 ; U3.3 90.79,8.89 ; U3.3 89.92,9.77 ; U3.3 89.92,8.01 ; U3.3 89.04,8.89 ; U7.5 22.86,8.03 ; U7.5 22.86,4.67 ; U7.5 21.18,6.35 ; U7.5 24.54,6.35
  BOTTOM w0.127: 7.62,54.95 U24.3 ; U24.3 6.69,55.88 ; U24.3 7.62,56.81 ; U24.3 8.55,55.88 ; 52.41,43.18 U64.3 ; U64.3 54.27,43.18 ; U64.3 53.34,44.11 ; U64.3 53.34,42.25 ; U5.1 50.15,11.43 ; U5.1 48.4,11.43 ; U5.1 49.28,12.31 ; U5.1 49.28,10.55 ; U8.6 73.66,8.03 ; U8.6 75.34,6.35 ; U8.6 73.66,4.67 ; U8.6 71.98,6.35 ; U3.3 89.92,9.77 ; U3.3 89.92,8.01 ; U3.3 90.79,8.89 ; U3.3 89.04,8.89 ; 39.64,91.44 U1.7 ; U1.7 41.64,91.44 ; U1.7 40.64,90.44 ; U1.7 40.64,92.44 ; U29.3 22.86,44.11 ; U29.3 23.79,43.18 ; U29.3 21.93,43.18 ; U29.3 22.86,42.25 ; 68.72,8.89 U2.3 ; U2.3 70.47,8.89 ; U2.3 69.6,8.01 ; U2.3 69.6,9.77 ; 35.52,14.46 U6.3 ; U6.3 34.74,15.24 ; U6.3 35.52,16.02 ; U6.3 36.3,15.24 ; U10.5 65.18,6.35 ; U10.5 63.5,4.67 ; U10.5 61.82,6.35 ; U10.5 63.5,8.03 ; 20.32,42.25 U32.3 ; U32.3 19.39,43.18 ; U32.3 20.32,44.11 ; U32.3 21.25,43.18 ; 16.85,68.58 U30.3 ; U30.3 18.71,68.58 ; U30.3 17.78,67.65 ; U30.3 17.78,69.51 ; 95.59,55.88 U66.3 ; U66.3 97.45,55.88 ; U66.3 96.52,54.95 ; U66.3 96.52,56.81 ; 96.52,65.11 U59.3 ; U59.3 96.52,66.97 ; U59.3 95.59,66.04 ; U59.3 97.45,66.04 ; U4.1 28.96,12.31 ; U4.1 29.83,11.43 ; U4.1 28.96,10.55 ; U4.1 28.08,11.43 ; 86.36,57.49 U44.3 ; U44.3 87.29,58.42 ; U44.3 86.36,59.35 ; U44.3 85.43,58.42 ; U1.4 36.56,93.98 ; U1.4 35.56,94.98 ; U1.4 34.56,93.98 ; U1.4 35.56,92.98 ; U1.1 34.02,91.44 ; U1.1 33.02,92.44 ; U1.1 32.02,91.44 ; U1.1 33.02,90.44 ; U53.3 78.74,44.11 ; U53.3 78.74,42.25 ; U53.3 79.67,43.18 ; U53.3 77.81,43.18 ; 44.79,43.18 U15.3 ; U15.3 45.72,42.25 ; U15.3 45.72,44.11 ; U15.3 46.65,43.18 ; 62.5,91.44 U1.25 ; U1.25 63.5,92.44 ; U1.25 64.5,91.44 ; U1.25 63.5,90.44 ; 11.02,6.35 U7.6 ; U7.6 14.38,6.35 ; U7.6 12.7,8.03 ; U7.6 12.7,4.67 ; 92.89,86.53 J1.3 ; J1.3 90.81,88.61 ; J1.3 94.96,88.61 ; J1.3 92.89,90.68 ; 55.88,42.25 U67.3 ; U67.3 56.81,43.18 ; U67.3 54.95,43.18 ; U67.3 55.88,44.11 ; U7.1 20.33,16.02 ; U7.1 21.11,15.24 ; U7.1 20.33,14.46 ; U7.1 19.55,15.24 ; M4.1 97.18,80 ; M4.1 91.82,80 ; M4.1 94.5,82.68 ; M4.1 94.5,77.32 ; U16.3 7.62,69.51 ; U16.3 6.69,68.58 ; U16.3 7.62,67.65 ; U16.3 8.55,68.58 ; 43.18,92.98 U1.10 ; U1.10 43.18,94.98 ; U1.10 42.18,93.98 ; U1.10 44.18,93.98 ; U1.19 55.88,92.44 ; U1.19 56.88,91.44 ; U1.19 55.88,90.44 ; U1.19 54.88,91.44 ; U8.5 83.82,8.03 ; U8.5 85.5,6.35 ; U8.5 82.14,6.35 ; U8.5 83.82,4.67 ; U3.1 90.79,11.43 ; U3.1 89.92,10.55 ; U3.1 89.04,11.43 ; U3.1 89.92,12.31 ; 73.66,42.25 U57.3 ; U57.3 72.73,43.18 ; U57.3 74.59,43.18 ; U57.3 73.66,44.11 ; M2.1 94.45,6.25 ; M2.1 97.13,3.57 ; M2.1 91.77,3.57 ; M2.1 94.45,0.89 ; 95.59,58.42 U65.3 ; U65.3 97.45,58.42 ; U65.3 96.52,57.49 ; U65.3 96.52,59.35 ; U45.3 86.36,56.81 ; U45.3 86.36,54.95 ; U45.3 85.43,55.88 ; U45.3 87.29,55.88 ; 16.85,55.88 U38.3 ; U38.3 17.78,54.95 ; U38.3 18.71,55.88 ; U38.3 17.78,56.81 ; U22.3 25.4,44.11 ; U22.3 25.4,42.25 ; U22.3 24.47,43.18 ; U22.3 26.33,43.18 ; 2.87,80 M3.1 ; M3.1 5.55,77.32 ; M3.1 5.55,82.68 ; M3.1 8.23,80 ; 14.42,15.24 U7.3 ; U7.3 15.98,15.24 ; U7.3 15.2,14.46 ; U7.3 15.2,16.02 ; U36.3 3.47,43.18 ; U36.3 2.54,42.25 ; U36.3 2.54,44.11 ; U36.3 1.61,43.18 ; 55.84,14.46 U10.3 ; U10.3 55.06,15.24 ; U10.3 56.62,15.24 ; U10.3 55.84,16.02 ; 69.6,10.55 U2.1 ; U2.1 68.72,11.43 ; U2.1 70.47,11.43 ; U2.1 69.6,12.31 ; U8.1 82.07,15.24 ; U8.1 81.29,14.46 ; U8.1 80.51,15.24 ; U8.1 81.29,16.02 ; 48.26,90.44 U1.13 ; U1.13 47.26,91.44 ; U1.13 48.26,92.44 ; U1.13 49.26,91.44 ; 28.08,8.89 U4.3 ; U4.3 28.96,8.01 ; U4.3 28.96,9.77 ; U4.3 29.83,8.89 ; U60.3 71.12,44.11 ; U60.3 71.12,42.25 ; U60.3 72.05,43.18 ; U60.3 70.19,43.18 ; U50.3 77.13,43.18 ; U50.3 76.2,42.25 ; U50.3 75.27,43.18 ; U50.3 76.2,44.11 ; U23.3 7.62,59.35 ; U23.3 8.55,58.42 ; U23.3 6.69,58.42 ; U23.3 7.62,57.49 ; U58.3 96.52,69.51 ; U58.3 97.45,68.58 ; U58.3 96.52,67.65 ; 27.01,43.18 U25.3 ; U25.3 27.94,42.25 ; U25.3 27.94,44.11 ; U25.3 28.87,43.18 ; 95.59,43.18 U43.3 ; U43.3 96.52,44.11 ; U43.3 96.52,42.25 ; U43.3 97.45,43.18 ; 50.89,64.77 U11.3 ; U11.3 51.82,63.84 ; U11.3 52.74,64.77 ; U11.3 51.82,65.7 ; 85.43,66.04 U52.3 ; U52.3 87.29,66.04 ; U52.3 86.36,66.97 ; U52.3 86.36,65.11 ; 17.78,65.11 U31.3 ; U31.3 18.71,66.04 ; U31.3 17.78,66.97 ; U31.3 16.85,66.04 ; U10.1 61.75,15.24 ; U10.1 60.19,15.24 ; U10.1 60.97,14.46 ; U10.1 60.97,16.02 ; 5.08,42.25 U39.3 ; U39.3 6.01,43.18 ; U39.3 4.15,43.18 ; U39.3 5.08,44.11 ; 2.87,3.57 M1.1 ; M1.1 5.55,0.89 ; M1.1 5.55,6.25 ; M1.1 8.23,3.57 ; 33.02,4.67 U6.6 ; U6.6 31.34,6.35 ; U6.6 33.02,8.03 ; U6.6 34.7,6.35 ; U6.1 40.65,16.02 ; U6.1 39.87,15.24 ; U6.1 41.43,15.24 ; U6.1 40.65,14.46 ; 6.69,66.04 U17.3 ; U17.3 7.62,66.97 ; U17.3 7.62,65.11 ; U17.3 8.55,66.04 ; U7.5 22.86,8.03 ; U7.5 22.86,4.67 ; U7.5 24.54,6.35 ; U7.5 21.18,6.35 ; 97.54,89.68 J1.2 ; J1.2 95.11,92.11 ; J1.2 97.54,94.53 ; U51.3 86.36,69.51 ; U51.3 85.43,68.58 ; U51.3 87.29,68.58 ; U51.3 86.36,67.65 ; U10.6 55.02,6.35 ; U10.6 51.66,6.35 ; U10.6 53.34,4.67 ; U10.6 53.34,8.03 ; U1.16 50.8,94.98 ; U1.16 51.8,93.98 ; U1.16 50.8,92.98 ; U1.16 49.8,93.98 ; U6.5 43.18,8.03 ; U6.5 41.5,6.35 ; U6.5 43.18,4.67 ; U6.5 44.86,6.35 ; 43.18,42.25 U18.3 ; U18.3 42.25,43.18 ; U18.3 44.11,43.18 ; U18.3 43.18,44.11 ; 49.28,8.01 U5.3 ; U5.3 50.15,8.89 ; U5.3 48.4,8.89 ; U5.3 49.28,9.77 ; U37.3 18.71,58.42 ; U37.3 17.78,59.35 ; U37.3 16.85,58.42 ; U37.3 17.78,57.49 ; U46.3 94.91,43.18 ; U46.3 93.05,43.18 ; U46.3 93.98,42.25 ; U46.3 93.98,44.11 ; U8.3 76.94,15.24 ; U8.3 75.38,15.24 ; U8.3 76.16,14.46 ; U8.3 76.16,16.02 ; U1.22 59.42,93.98 ; U1.22 58.42,94.98 ; U1.22 57.42,93.98 ; U1.22 58.42,92.98
  vias: v1(1.78,95.57) v1(1.78,91.57) v1(1.78,87.57) v1(1.78,83.57) v1(2.22,35.5) v1(2.22,31.5) v1(2.22,26.1) v1(2.22,22.1) v1(2.22,14.67) v1(2.22,10.67) v1(5.52,50.86) v1(5.52,46.86) v1(5.78,95.57) v1(5.78,91.57) v1(5.78,87.57) v1(5.78,83.57) v1(6.22,10.67) v1(6.86,38.61) v1(7.11,32.76) v1(7.11,28.76) v1(7.11,24.76) v1(7.11,20.76) v1(7.3,35.88) v1(8.13,38.61) v1(8.53,27.76) v1(8.53,25.81) v1(8.78,28.73) v1(8.75,26.79) v1(8.93,24.9) v1(9.14,1.59) v1(9.19,38.64) v1(9.19,37.64) v1(9.19,36.64) v1(9.19,35.64) v1(9.19,34.64) v1(9.19,33.64) v1(9.19,32.64) v1(9.19,31.64) v1(9.19,30.64) v1(9.19,29.64) v1(9.19,23.93) v1(9.19,22.93) v1(9.19,21.93) v1(9.19,20.93) v1(9.19,19.93) v1(9.19,18.93) v1(9.29,47.23) v1(9.29,46.23) v1(9.49,17.98) v1(9.78,95.57) v1(9.78,91.57) v1(9.78,87.57) v1(9.78,83.57) v1(9.78,80.01) v1(9.84,61.02) v1(9.84,57.02) v1(9.93,48) v1(10.2,17.27) v1(10.64,48.7) v1(10.67,50.8) v1(10.77,27.65) v1(10.81,25.68) v1(10.94,38.64) v1(10.94,37.64) v1(10.94,36.64) v1(10.94,35.64) v1(10.94,34.64) v1(10.94,33.64) v1(10.94,32.64) v1(10.94,31.64) v1(10.94,30.64) v1(10.94,29.64) v1(10.94,28.64) v1(10.94,26.67) v1(10.94,24.68) v1(10.94,23.68) v1(10.94,22.68) v1(10.94,21.68) v1(10.94,20.68) v1(10.94,19.68) v1(10.9,16.57) v1(10.92,8.64) v1(11.04,46.23) v1(11.21,18.72) v1(11.35,49.41) v1(11.51,47.11) v1(11.61,15.86) v1(11.92,18.02) v1(12.05,50.12) v1(12.22,47.81) v1(12.19,11.68) v1(12.19,8.64) v1(12.32,15.15) v1(12.63,17.31) v1(12.76,50.83) v1(12.93,48.52) v1(12.95,33.27) v1(12.95,32) v1(12.95,30.73) v1(12.95,29.46) v1(13.02,14.44) v1(13.14,1.59) v1(13.33,16.6) v1(13.47,51.53) v1(13.46,34.54) v1(13.46,28.45) v1(13.63,49.23) v1(13.72,62.99) v1(13.72,61.21) v1(13.73,13.74) v1(13.72,8.64) v1(13.78,95.57) v1(13.78,91.57) v1(13.78,87.57) v1(13.78,83.57) v1(13.78,80.01) v1(13.97,39.37) v1(14.04,15.89) v1(14.17,52.24) v1(14.34,49.94) v1(14.38,47.23) v1(14.38,46.23) v1(14.44,13.03) v1(14.46,38.64) v1(14.48,37.59) v1(14.46,36.64) v1(14.46,35.64) v1(14.48,27.94) v1(14.46,26.84) v1(14.46,25.84) v1(14.46,24.84) v1(14.46,23.84) v1(14.46,22.84) v1(14.46,21.84) v1(14.46,20.84) v1(14.46,19.84) v1(14.46,18.84) v1(14.46,17.84) v1(14.88,52.95) v1(14.86,48.1) v1(14.86,16.93) v1(15.05,50.64) v1(14.99,8.38) v1(15.04,7.2) v1(15.04,6.2) v1(15.04,5.2) v1(15.14,12.32) v1(15.57,48.81) v1(15.83,53.27) v1(15.76,51.35) v1(16.01,11.83) v1(16.12,46.23) v1(16.06,32.65) v1(16.15,31.65) v1(16.11,30.65) v1(16.12,29.65) v1(16.14,28.65) v1(16.21,38.64) v1(16.21,36.64) v1(16.21,35.64) v1(16.21,34.64) v1(16.17,33.64) v1(16.21,27.65) v1(16.21,26.65) v1(16.21,25.65) v1(16.21,24.65) v1(16.21,23.65) v1(16.21,22.65) v1(16.21,21.65) v1(16.21,20.65) v1(16.21,19.65) v1(16.21,18.65) v1(16.16,13.77) v1(16.26,62.99) v1(16.26,61.21) v1(16.28,49.51) v1(16.41,47.18) v1(16.54,17.71) v1(16.74,51.53) v1(16.83,53.27) v1(16.76,14.48) v1(17.02,13.72) v1(17.02,11.68) v1(17.12,47.89) v1(17.14,1.59) v1(17.23,49.82) v1(17.25,17) v1(17.53,38.61) v1(17.53,32.76) v1(17.53,28.76) v1(17.53,24.76) v1(17.53,20.76) v1(17.74,51.53) v1(17.65,9.59) v1(17.65,5.59) v1(17.78,95.57) v1(17.78,91.57) v1(17.78,87.57) v1(17.78,83.57) v1(17.78,80.01) v1(17.83,53.27) v1(18.1,48.07) v1(18.23,49.82) v1(18.54,16.51) v1(18.54,14.48) v1(18.54,13.72) v1(18.54,11.68) v1(18.74,51.53) v1(18.83,53.27) v1(18.8,38.61) v1(19.1,48.07) v1(19.24,97.6) v1(19.23,49.82) v1(19.3,41.66) v1(19.3,39.88) v1(19.74,51.53) v1(19.83,53.27) v1(20.1,48.07) v1(20.23,49.82) v1(20.62,7.2) v1(20.62,6.2) v1(20.62,5.2) v1(20.74,51.53) v1(20.83,53.27) v1(20.83,8.38) v1(21.08,95.57) v1(21.08,91.57) v1(21.08,87.57) v1(21.08,83.57) v1(21.08,80.01) v1(21.08,73.15) v1(21.1,48.07) v1(21.14,1.59) v1(21.23,49.82) v1(21.53,61.02) v1(21.53,57.02) v1(21.53,16.76) v1(21.74,51.53) v1(21.83,53.27) v1(22.1,48.07) v1(22.1,8.64) v1(22.23,49.82) v1(22.61,69.09) v1(22.74,51.53) v1(22.82,53.37) v1(22.8,45.91) v1(23.11,97.6) v1(23.1,48.07) v1(23.23,49.82) v1(23.53,54.08) v1(23.49,14.92) v1(23.49,10.92) v1(23.62,8.64) v1(23.71,51.78) v1(24.1,48.07) v1(24.24,54.78) v1(24.22,49.96) v1(24.38,89.92) v1(24.38,85.6) v1(24.38,81.28) v1(24.38,72.64) v1(24.41,52.49) v1(24.64,93.73) v1(24.89,70.36) v1(24.94,55.49) v1(24.92,50.67) v1(24.89,8.64) v1(25.15,78.49) v1(25.08,62.04) v1(25.08,58.04) v1(25.12,53.2) v1(25.07,48.34) v1(25.15,7.37) v1(25.15,6.1) v1(25.15,4.83) v1(25.34,91.38) v1(25.34,87.38) v1(25.53,24.76) v1(25.53,20.76) v1(25.53,16.76) v1(25.63,51.38) v1(25.65,56.2) v1(25.65,1.59) v1(25.83,53.9) v1(25.77,49.05) v1(26.34,52.08) v1(26.36,56.9) v1(26.53,54.61) v1(26.48,49.76) v1(27.05,52.79) v1(27.11,97.6) v1(27.07,57.61) v1(27.24,55.32) v1(27.19,50.46) v1(27.77,58.32) v1(27.75,53.5) v1(27.95,56.03) v1(27.89,51.17) v1(28.19,72.64) v1(28.48,59.03) v1(28.46,54.21) v1(28.6,51.88) v1(28.66,56.73) v1(28.96,41.66) v1(28.96,39.62) v1(29.21,78.49) v1(29.19,59.73) v1(29.17,54.91) v1(29.34,91.38) v1(29.34,87.38) v1(29.31,52.59) v1(29.36,57.44) v1(29.72,93.98) v1(29.71,61.59) v1(29.71,60.59) v1(29.65,1.59) v1(29.87,55.62) v1(29.91,49.97) v1(30.02,53.29) v1(30.07,58.15) v1(30.1,24.76) v1(30.1,20.76) v1(30.1,16.76) v1(30.48,68.07) v1(30.48,67.06) v1(30.48,65.02) v1(30.48,64.01) v1(30.48,31.75) v1(30.48,30.48) v1(30.58,56.33) v1(30.72,54) v1(30.78,58.85) v1(30.92,97.6) v1(30.99,66.04) v1(30.99,63.5) v1(30.99,38.61) v1(31.24,68.58) v1(31.18,58.13) v1(31.18,57.13) v1(31.24,4.32) v1(31.43,54.71) v1(31.45,59.59) v1(31.5,32.51) v1(31.5,29.72) v1(31.5,8.64) v1(32,66.04) v1(32,63.5) v1(32.14,55.41) v1(32.05,38.64) v1(32.05,37.64) v1(32.05,36.64) v1(32.05,35.64) v1(32.05,34.64) v1(32.05,33.64) v1(32.05,28.63) v1(32.05,27.63) v1(32.05,26.63) v1(32.05,25.63) v1(32.05,24.63) v1(32.05,23.63) v1(32.05,22.63) v1(32.05,21.63) v1(32.05,20.63) v1(32.05,19.63) v1(32.05,18.63) v1(32.05,17.63) v1(32.05,16.63) v1(32.05,15.63) v1(32.16,49.61) v1(32.16,48.61) v1(32.16,47.61) v1(32.16,46.56) v1(32.16,45.56) v1(32.26,68.58) v1(32.46,14.72) v1(32.51,4.32) v1(32.65,50.48) v1(32.84,56.12) v1(32.77,10.92) v1(32.77,8.64) v1(33.02,77.98) v1(33.02,68.07) v1(33.02,67.06) v1(33.02,66.04) v1(33.02,65.02) v1(33.02,64.01) v1(33.15,58.94) v1(33.15,57.94) v1(33.15,54.23) v1(33.15,52.34) v1(33.15,51.34) v1(33.17,14.01) v1(33.27,83.06) v1(33.27,74.17) v1(33.53,57.02) v1(33.51,55.16) v1(33.49,53.29) v1(33.65,30.65) v1(33.65,1.59) v1(33.78,68.58) v1(33.8,38.64) v1(33.8,37.64) v1(33.8,36.64) v1(33.8,35.64) v1(33.8,34.64) v1(33.8,33.64) v1(33.8,32.64) v1(33.77,31.64) v1(33.8,29.66) v1(33.8,28.66) v1(33.8,27.66) v1(33.8,26.66) v1(33.8,25.66) v1(33.8,24.66) v1(33.8,23.66) v1(33.8,22.66) v1(33.8,21.66) v1(33.8,20.66) v1(33.8,19.66) v1(33.8,18.66) v1(33.8,17.66) v1(33.8,16.66) v1(33.9,49.19) v1(33.9,48.19) v1(33.9,47.19) v1(33.9,46.19) v1(33.88,13.3) v1(34.04,85.6) v1(34.04,66.04) v1(34.04,63.5) v1(34.04,39.88) v1(33.97,15.67) v1(34.04,8.64) v1(34.04,4.32) v1(34.58,49.93) v1(34.58,12.59) v1(34.8,97.6) v1(34.8,68.58) v1(34.8,28.7) v1(34.8,27.69) v1(34.8,26.67) v1(34.8,25.65) v1(34.9,59.94) v1(34.9,58.94) v1(34.94,51.88) v1(34.9,50.88) v1(35.05,66.04) v1(35.05,63.5) v1(35.31,29.46) v1(35.29,11.89) v1(35.31,8.64) v1(35.31,4.32) v1(35.35,7.46) v1(35.35,6.46) v1(35.35,5.46) v1(35.56,68.07) v1(35.56,67.06) v1(35.56,65.02) v1(35.56,64.01) v1(35.56,25.15) v1(35.81,73.91) v1(35.94,51.89) v1(36.07,58.42) v1(36.11,13.57) v1(36.32,87.38) v1(36.32,29.46) v1(36.29,11.83) v1(36.38,61.94) v1(36.58,78.99) v1(36.64,61.19) v1(36.58,24.89) v1(36.82,54.28) v1(36.81,52.37) v1(37.08,57.66) v1(37.08,56.64) v1(37.11,55.24) v1(37.12,53.33) v1(37.08,39.88) v1(37.11,13.57) v1(37.23,47.96) v1(37.23,46.96) v1(37.23,45.96) v1(37.23,38.64) v1(37.23,37.64) v1(37.23,36.64) v1(37.23,35.64) v1(37.23,34.64) v1(37.23,33.64) v1(37.23,32.64) v1(37.23,31.64) v1(37.23,30.64) v1(37.23,29.64) v1(37.23,23.96) v1(37.23,22.96) v1(37.23,21.96) v1(37.23,20.96) v1(37.23,19.96) v1(37.23,18.96) v1(37.23,17.96) v1(37.23,16.96) v1(37.23,15.96) v1(37.27,50.94) v1(37.26,48.96) v1(37.29,11.83) v1(37.37,51.94) v1(37.41,49.95) v1(37.45,60.38) v1(37.65,1.59) v1(37.85,87.38) v1(37.97,9.33) v1(37.97,5.33) v1(38.16,59.67) v1(38.6,27.71) v1(38.6,25.86) v1(38.8,97.6) v1(38.87,58.96) v1(38.98,56.91) v1(38.98,55.91) v1(38.98,54.91) v1(38.98,47.5) v1(39.01,46.46) v1(39.01,45.46) v1(38.97,37.64) v1(38.97,36.64) v1(38.97,35.64) v1(38.97,34.64) v1(38.97,33.64) v1(38.97,32.64) v1(38.97,31.64) v1(38.97,30.64) v1(38.97,29.64) v1(38.97,28.64) v1(38.97,26.79) v1(38.97,24.93) v1(38.97,23.93) v1(38.97,22.93) v1(38.97,21.93) v1(38.97,20.93) v1(38.97,19.93) v1(38.97,18.93) v1(38.97,17.93) v1(38.97,16.93) v1(38.97,15.93) v1(39.12,57.91) v1(39.06,38.64) v1(39.12,13.72) v1(39.12,11.68) v1(39.37,76.71) v1(39.55,48.32) v1(39.98,54.82) v1(40.55,48.35) v1(40.83,28.76) v1(40.83,24.76) v1(40.83,20.76) v1(40.89,8.64) v1(40.94,7.46) v1(40.94,6.46) v1(40.94,5.46) v1(40.96,54.63) v1(41.08,16.76) v1(41.15,4.32) v1(41.42,50.87) v1(41.38,48.91) v1(41.46,52.84) v1(41.57,53.84) v1(41.59,51.85) v1(41.6,49.88) v1(41.91,87.38) v1(42.04,1.59) v1(42.16,74.17) v1(42.16,8.64) v1(42.42,4.32) v1(42.8,97.6) v1(43.43,8.64) v1(43.62,56.45) v1(43.62,52.2) v1(43.56,14.67) v1(43.56,10.67) v1(43.69,47.75) v1(43.94,4.32) v1(44.7,8.64) v1(45.15,71.44) v1(45.15,67.44) v1(45.47,7.37) v1(45.47,6.1) v1(45.47,4.83) v1(45.72,87.38) v1(45.72,82.3) v1(45.72,77.47) v1(45.66,20.76) v1(45.66,16.76) v1(46.04,1.59) v1(46.8,97.6) v1(47.18,56.45) v1(47.18,52.2) v1(47.24,47.75) v1(49.53,87.12) v1(49.78,78.49) v1(49.78,1.59) v1(50.04,74.17) v1(50.55,47.75) v1(50.55,43.94) v1(50.74,56.45) v1(50.74,52.2) v1(50.74,40.77) v1(50.74,36.77) v1(50.74,32.77) v1(50.74,28.76) v1(50.74,24.76) v1(50.74,20.76) v1(50.74,16.76) v1(51.31,97.6) v1(52.07,8.64) v1(52.07,4.06) v1(52.77,58.99) v1(52.77,54.99) v1(53.34,87.12) v1(53.34,82.55) v1(53.34,79.5) v1(53.41,19.64) v1(53.41,18.64) v1(53.41,17.64) v1(53.41,16.64) v1(53.41,15.64) v1(53.41,14.64) v1(53.41,13.64) v1(53.63,20.62) v1(53.59,8.64) v1(53.59,4.06) v1(53.85,70.36) v1(53.78,1.59) v1(54.1,76.71) v1(54.1,12.92) v1(54.33,21.33) v1(55.04,22.03) v1(55.1,12.87) v1(55.12,8.64) v1(55.15,19.54) v1(55.15,18.54) v1(55.15,17.54) v1(55.15,16.54) v1(55.31,97.6) v1(55.31,32.77) v1(55.31,28.76) v1(55.37,4.06) v1(55.75,22.74) v1(55.67,7.46) v1(55.67,6.46) v1(55.67,5.46) v1(55.79,20.32) v1(56.1,12.87) v1(56.45,23.45) v1(56.5,21.02) v1(56.64,74.68) v1(56.64,41.66) v1(56.64,39.62) v1(56.68,52.51) v1(56.67,50.55) v1(56.87,51.52) v1(56.91,49.57) v1(57.15,16) v1(57.15,14.73) v1(57.1,12.79) v1(57.22,53.35) v1(57.16,24.16) v1(57.2,21.73) v1(57.34,84.01) v1(57.34,80.01) v1(57.4,11.68) v1(57.55,17.92) v1(57.55,16.92) v1(57.75,49.03) v1(57.66,18.91) v1(57.78,1.59) v1(57.91,38.35) v1(57.87,24.86) v1(57.91,22.44) v1(58.18,53.61) v1(58.29,5.84) v1(58.42,87.63) v1(58.37,19.62) v1(58.58,25.57) v1(58.62,23.14) v1(58.75,49) v1(58.93,38.35) v1(59.07,20.33) v1(59.18,53.61) v1(59.31,97.6) v1(59.28,26.28) v1(59.32,23.85) v1(59.3,18.08) v1(59.29,17.08) v1(59.29,16.08) v1(59.44,13.72) v1(59.44,11.68) v1(59.75,49) v1(59.78,21.03) v1(59.99,37.98) v1(59.99,36.98) v1(59.99,35.98) v1(59.99,34.98) v1(59.99,33.98) v1(59.99,32.98) v1(59.99,31.98) v1(59.99,30.98) v1(59.99,29.98) v1(59.99,28.98) v1(59.99,27.98) v1(59.99,26.98) v1(60.03,24.56) v1(60,18.79) v1(60.09,54.02) v1(60.09,48.07) v1(60.09,47.07) v1(60.18,55.01) v1(60.49,21.74) v1(60.74,25.26) v1(60.71,19.5) v1(60.89,55.72) v1(61.19,22.45) v1(61.34,84.01) v1(61.34,80.01) v1(61.45,25.97) v1(61.42,20.2) v1(61.47,76.96) v1(61.47,71.12) v1(61.59,56.43) v1(61.68,51.95) v1(61.72,49.96) v1(61.74,37.93) v1(61.74,36.93) v1(61.74,35.93) v1(61.74,34.93) v1(61.74,33.93) v1(61.74,32.93) v1(61.74,31.93) v1(61.74,30.93) v1(61.74,29.93) v1(61.74,28.93) v1(61.74,27.93) v1(61.74,26.93) v1(61.84,53.94) v1(61.81,52.94) v1(61.8,50.96) v1(61.84,48.97) v1(61.84,47.97) v1(61.84,46.97) v1(61.84,45.97) v1(61.78,1.59) v1(61.9,23.16) v1(61.98,38.86) v1(62.13,20.91) v1(62.3,57.13) v1(62.4,54.77) v1(62.48,8.89) v1(62.61,23.86) v1(62.83,21.62) v1(63.01,57.84) v1(63.11,55.47) v1(63.25,73.41) v1(63.21,33.67) v1(63.21,31.82) v1(63.31,97.6) v1(63.32,24.57) v1(63.5,86.87) v1(63.54,22.33) v1(63.55,34.61) v1(63.58,32.74) v1(63.58,30.89) v1(63.71,58.55) v1(63.82,56.18) v1(64.02,25.28) v1(64.01,11.68) v1(64.01,8.89) v1(64.25,23.03) v1(64.42,59.25) v1(64.44,35.06) v1(64.52,56.89) v1(64.49,30.47) v1(64.73,25.98) v1(64.84,39.72) v1(65.02,76.96) v1(64.95,23.74) v1(65.13,59.96) v1(65.22,61.96) v1(65.22,60.96) v1(65.17,57.48) v1(65.17,56.48) v1(65.17,55.48) v1(65.17,54.48) v1(65.17,53.48) v1(65.17,52.48) v1(65.17,51.48) v1(65.23,49.48) v1(65.21,47.5) v1(65.17,46.5) v1(65.28,50.48) v1(65.33,48.49) v1(65.26,36.64) v1(65.26,35.64) v1(65.26,29.83) v1(65.26,28.83) v1(65.26,27.83) v1(65.26,26.83) v1(65.28,20.57) v1(65.28,8.89) v1(65.53,6.86) v1(65.53,5.08) v1(65.66,24.45) v1(65.81,58.25) v1(66.04,68.07) v1(66.04,67.06) v1(66.04,65.02) v1(66.04,64.01) v1(66.29,87.38) v1(66.29,84.07) v1(66.29,1.59) v1(66.37,25.15) v1(66.55,68.58) v1(66.55,66.04) v1(66.55,63.5) v1(66.51,58.96) v1(66.61,33.72) v1(66.72,59.94) v1(66.66,31.86) v1(66.92,56.41) v1(66.92,55.41) v1(66.92,54.41) v1(66.92,53.41) v1(66.92,52.41) v1(66.92,51.41) v1(66.92,45.99) v1(67.01,36.64) v1(67.01,35.64) v1(67.01,34.64) v1(67.01,32.8) v1(67.01,30.92) v1(67.01,29.92) v1(67.01,28.92) v1(67.01,27.92) v1(67.01,26.92) v1(67.01,25.92) v1(67.34,57.32) v1(67.49,46.81) v1(67.56,68.58) v1(67.56,66.04) v1(67.56,63.5) v1(67.69,97.6) v1(67.92,51.41) v1(68.05,58.03) v1(68.49,46.81) v1(68.58,76.96) v1(68.58,68.07) v1(68.58,67.06) v1(68.58,66.04) v1(68.58,65.02) v1(68.58,64.01) v1(68.58,38.35) v1(68.58,20.57) v1(68.7,58.94) v1(68.7,57.94) v1(68.91,56.96) v1(68.92,51.39) v1(69.34,68.58) v1(69.34,63.5) v1(69.46,47.07) v1(69.6,66.04) v1(69.62,56.25) v1(69.6,38.35) v1(69.85,87.38) v1(69.85,84.07) v1(69.85,80.01) v1(69.76,50.84) v1(69.79,48.89) v1(69.85,42.67) v1(70,49.87) v1(69.99,47.91) v1(70.1,41.4) v1(70.1,39.88) v1(70.32,55.55) v1(70.29,1.59) v1(70.36,68.58) v1(70.36,63.5) v1(70.44,59.94) v1(70.44,58.94) v1(70.44,57.94) v1(70.61,66.04) v1(71.03,54.84) v1(71.12,68.07) v1(71.12,67.06) v1(71.12,65.02) v1(71.12,64.01) v1(71.13,57.21) v1(71.28,58.29) v1(71.63,7.62) v1(71.63,5.84) v1(71.69,97.6) v1(71.74,54.13) v1(71.84,56.5) v1(71.88,4.57) v1(71.97,61.93) v1(71.97,60.93) v1(71.99,57.58) v1(72.1,59.94) v1(72.44,53.42) v1(72.39,13.21) v1(72.39,10.41) v1(72.39,8.64) v1(72.54,55.8) v1(72.47,50.68) v1(72.64,52.07) v1(72.7,56.88) v1(72.81,59.23) v1(73.02,99.12) v1(73.03,49.85) v1(73.22,21.11) v1(73.22,20.11) v1(73.22,19.11) v1(73.22,18.11) v1(73.22,17.11) v1(73.22,16.11) v1(73.22,15.11) v1(73.25,55.09) v1(73.41,80.01) v1(73.41,76.96) v1(73.41,56.17) v1(73.41,22.09) v1(73.52,58.53) v1(73.6,46.16) v1(73.6,33.46) v1(73.6,29.46) v1(73.65,14.21) v1(73.83,49.26) v1(73.91,8.64) v1(73.96,54.38) v1(74.11,55.46) v1(74.12,22.8) v1(74.22,57.82) v1(74.17,10.67) v1(74.29,1.59) v1(74.44,48.46) v1(74.36,13.51) v1(74.62,53.64) v1(74.82,54.76) v1(74.83,23.51) v1(74.93,57.11) v1(74.96,20.94) v1(74.96,19.94) v1(74.96,18.94) v1(74.96,17.94) v1(74.96,16.94) v1(74.96,15.94) v1(75.07,12.8) v1(75.21,47.82) v1(75.18,8.64) v1(75.29,52.89) v1(75.44,4.57) v1(75.53,24.22) v1(75.55,21.76) v1(75.64,56.41) v1(75.61,54.14) v1(75.69,62.23) v1(75.69,59.18) v1(75.78,12.09) v1(76.02,52.2) v1(76,7.46) v1(76,6.46) v1(76,5.46) v1(76.14,46.16) v1(76.2,48.26) v1(76.24,24.92) v1(76.26,53.38) v1(76.25,22.47) v1(76.45,71.37) v1(76.64,56.48) v1(76.73,51.51) v1(76.74,13.6) v1(76.74,11.83) v1(76.95,25.63) v1(77.02,99.12) v1(76.96,76.96) v1(77.05,52.77) v1(76.96,23.17) v1(77.4,50.76) v1(77.47,48.51) v1(77.62,56.64) v1(77.64,51.97) v1(77.66,26.34) v1(77.67,23.88) v1(77.74,13.57) v1(77.74,11.83) v1(77.87,17.33) v1(77.87,16.33) v1(78.23,68.83) v1(78.33,51.24) v1(78.32,18.22) v1(78.29,1.59) v1(78.45,56.08) v1(78.36,27.04) v1(78.37,24.59) v1(78.49,62.23) v1(78.49,59.18) v1(78.49,9.4) v1(78.61,6.1) v1(78.69,48.45) v1(79.05,55.27) v1(79.04,50.53) v1(79.03,18.92) v1(79.07,27.75) v1(79.08,25.29) v1(79.44,52.84) v1(79.4,47.74) v1(79.61,16.84) v1(79.61,15.84) v1(79.75,49.83) v1(79.74,19.63) v1(79.84,54.66) v1(79.76,41.66) v1(79.76,39.62) v1(79.78,28.46) v1(79.79,26) v1(79.76,13.97) v1(79.99,53.67) v1(80.02,52.02) v1(80.11,47.03) v1(80.21,17.64) v1(80.26,80.01) v1(80.26,76.96) v1(80.26,33.02) v1(80.26,30.48) v1(80.44,20.34) v1(80.46,49.12) v1(80.48,29.17) v1(80.5,26.71) v1(80.73,51.32) v1(80.81,46.33) v1(80.77,38.35) v1(80.92,18.34) v1(81.16,48.41) v1(81.19,29.87) v1(81.2,27.42) v1(81.15,21.04) v1(81.44,50.61) v1(81.63,19.05) v1(81.79,38.35) v1(81.87,47.71) v1(81.9,30.58) v1(81.91,28.12) v1(81.86,21.75) v1(82.14,49.9) v1(82.33,19.76) v1(82.58,47) v1(82.61,31.29) v1(82.62,28.83) v1(82.57,22.46) v1(82.68,1.59) v1(82.8,8.64) v1(82.85,49.19) v1(82.85,38.26) v1(82.85,37.26) v1(82.85,36.26) v1(82.85,35.26) v1(82.85,34.26) v1(82.85,33.26) v1(82.85,32.26) v1(83.04,20.47) v1(83.28,46.29) v1(83.32,29.54) v1(83.27,23.17) v1(83.57,80.01) v1(83.57,76.96) v1(83.56,48.49) v1(83.57,18.8) v1(83.57,14.73) v1(83.75,21.17) v1(84.01,45.61) v1(84.03,30.24) v1(83.98,23.87) v1(84.27,47.78) v1(84.33,8.64) v1(84.46,21.88) v1(84.6,38.07) v1(84.6,37.07) v1(84.6,36.07) v1(84.6,35.07) v1(84.6,34.07) v1(84.6,33.07) v1(84.6,32.07) v1(84.6,31.07) v1(84.69,24.58) v1(85.09,53.09) v1(85.09,50.04) v1(85.17,47.35) v1(85.16,22.59) v1(85.39,25.29) v1(85.49,34.29) v1(85.67,35.27) v1(85.87,23.29) v1(85.85,18.29) v1(85.85,7.11) v1(85.85,5.33) v1(86.03,33.45) v1(86.1,25.99) v1(86.17,47.35) v1(86.48,35.86) v1(86.61,80.01) v1(86.61,76.96) v1(86.58,24) v1(86.68,1.59) v1(86.81,26.7) v1(86.87,15.49) v1(86.87,13.21) v1(87.12,98.3) v1(87.12,97.03) v1(87.12,95.76) v1(87.12,33.02) v1(87.17,47.1) v1(87.28,24.71) v1(87.31,22.8) v1(87.38,36.07) v1(87.52,27.41) v1(87.63,39.62) v1(87.88,53.09) v1(87.88,50.04) v1(87.91,46.42) v1(87.99,25.42) v1(88.12,38.64) v1(88.12,37.64) v1(88.12,36.64) v1(88.12,32.2) v1(88.12,31.2) v1(88.12,30.2) v1(88.12,29.2) v1(88.12,28.2) v1(88.39,98.3) v1(88.39,97.03) v1(88.39,95.76) v1(88.61,45.72) v1(88.7,26.12) v1(88.9,16.51) v1(89.09,71.94) v1(89.09,67.94) v1(89.32,45.01) v1(89.41,26.83) v1(89.59,34.68) v1(89.66,98.3) v1(89.66,97.03) v1(89.66,95.76) v1(89.66,80.01) v1(89.66,76.96) v1(89.85,61.28) v1(89.85,57.28) v1(89.87,38.64) v1(89.87,37.64) v1(89.87,36.64) v1(89.87,35.64) v1(89.86,33.72) v1(89.87,32.72) v1(89.87,31.72) v1(89.87,30.72) v1(89.87,29.72) v1(89.87,28.72) v1(89.87,27.72) v1(90.68,47.75) v1(90.93,13.97) v1(91.19,38.61) v1(91.31,22.8) v1(91.31,18.8) v1(91.95,29.97) v1(91.95,26.92) v1(92.2,38.61) v1(92.71,52.58) v1(92.96,39.62) v1(93.98,46.48) v1(94.17,13.14) v1(94.17,9.14) v1(95.25,50.04) v1(96.01,33.78) v1(96.01,30.73) v1(96.01,27.69) v1(96.01,24.64) v1(96.01,21.84) v1(96.01,18.8) v1(98.17,13.14) v1(98.17,9.14) v1(99.25,72.71) v1(99.25,68.71) v1(99.25,65.09) v1(99.25,61.09) v1(99.25,56.96) v1(99.25,52.96) v1(99.25,48.58) v1(99.25,16.89)
